# EAGLE board SparkX_smol_Environmental-Panel (EAGLE 9.6.2), part 1 of 9
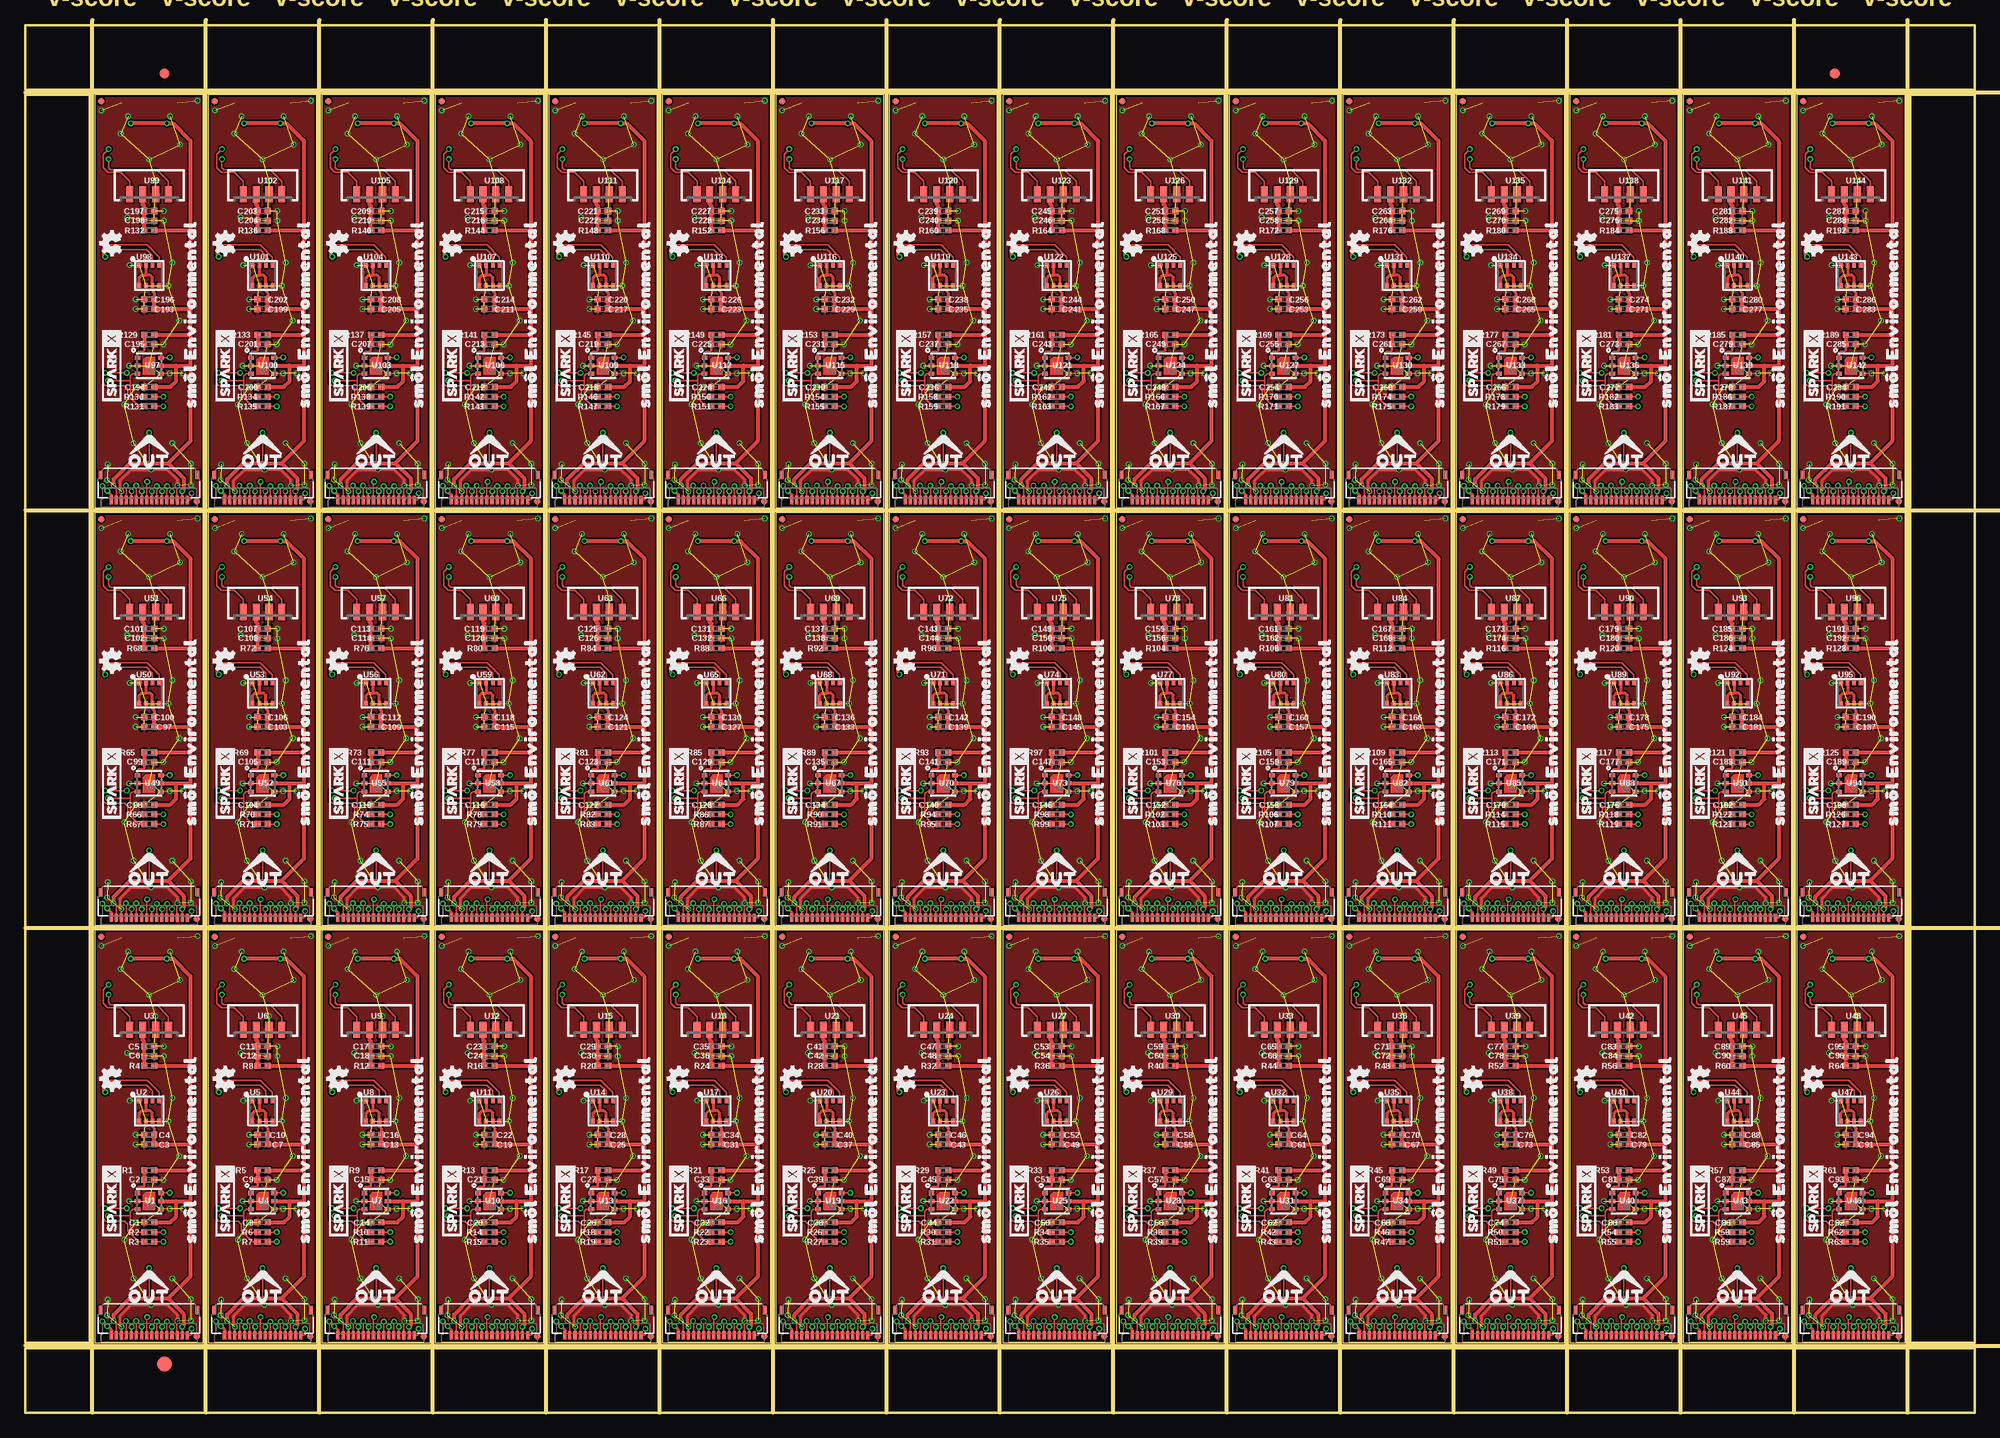
[diagram p0: board, top side]
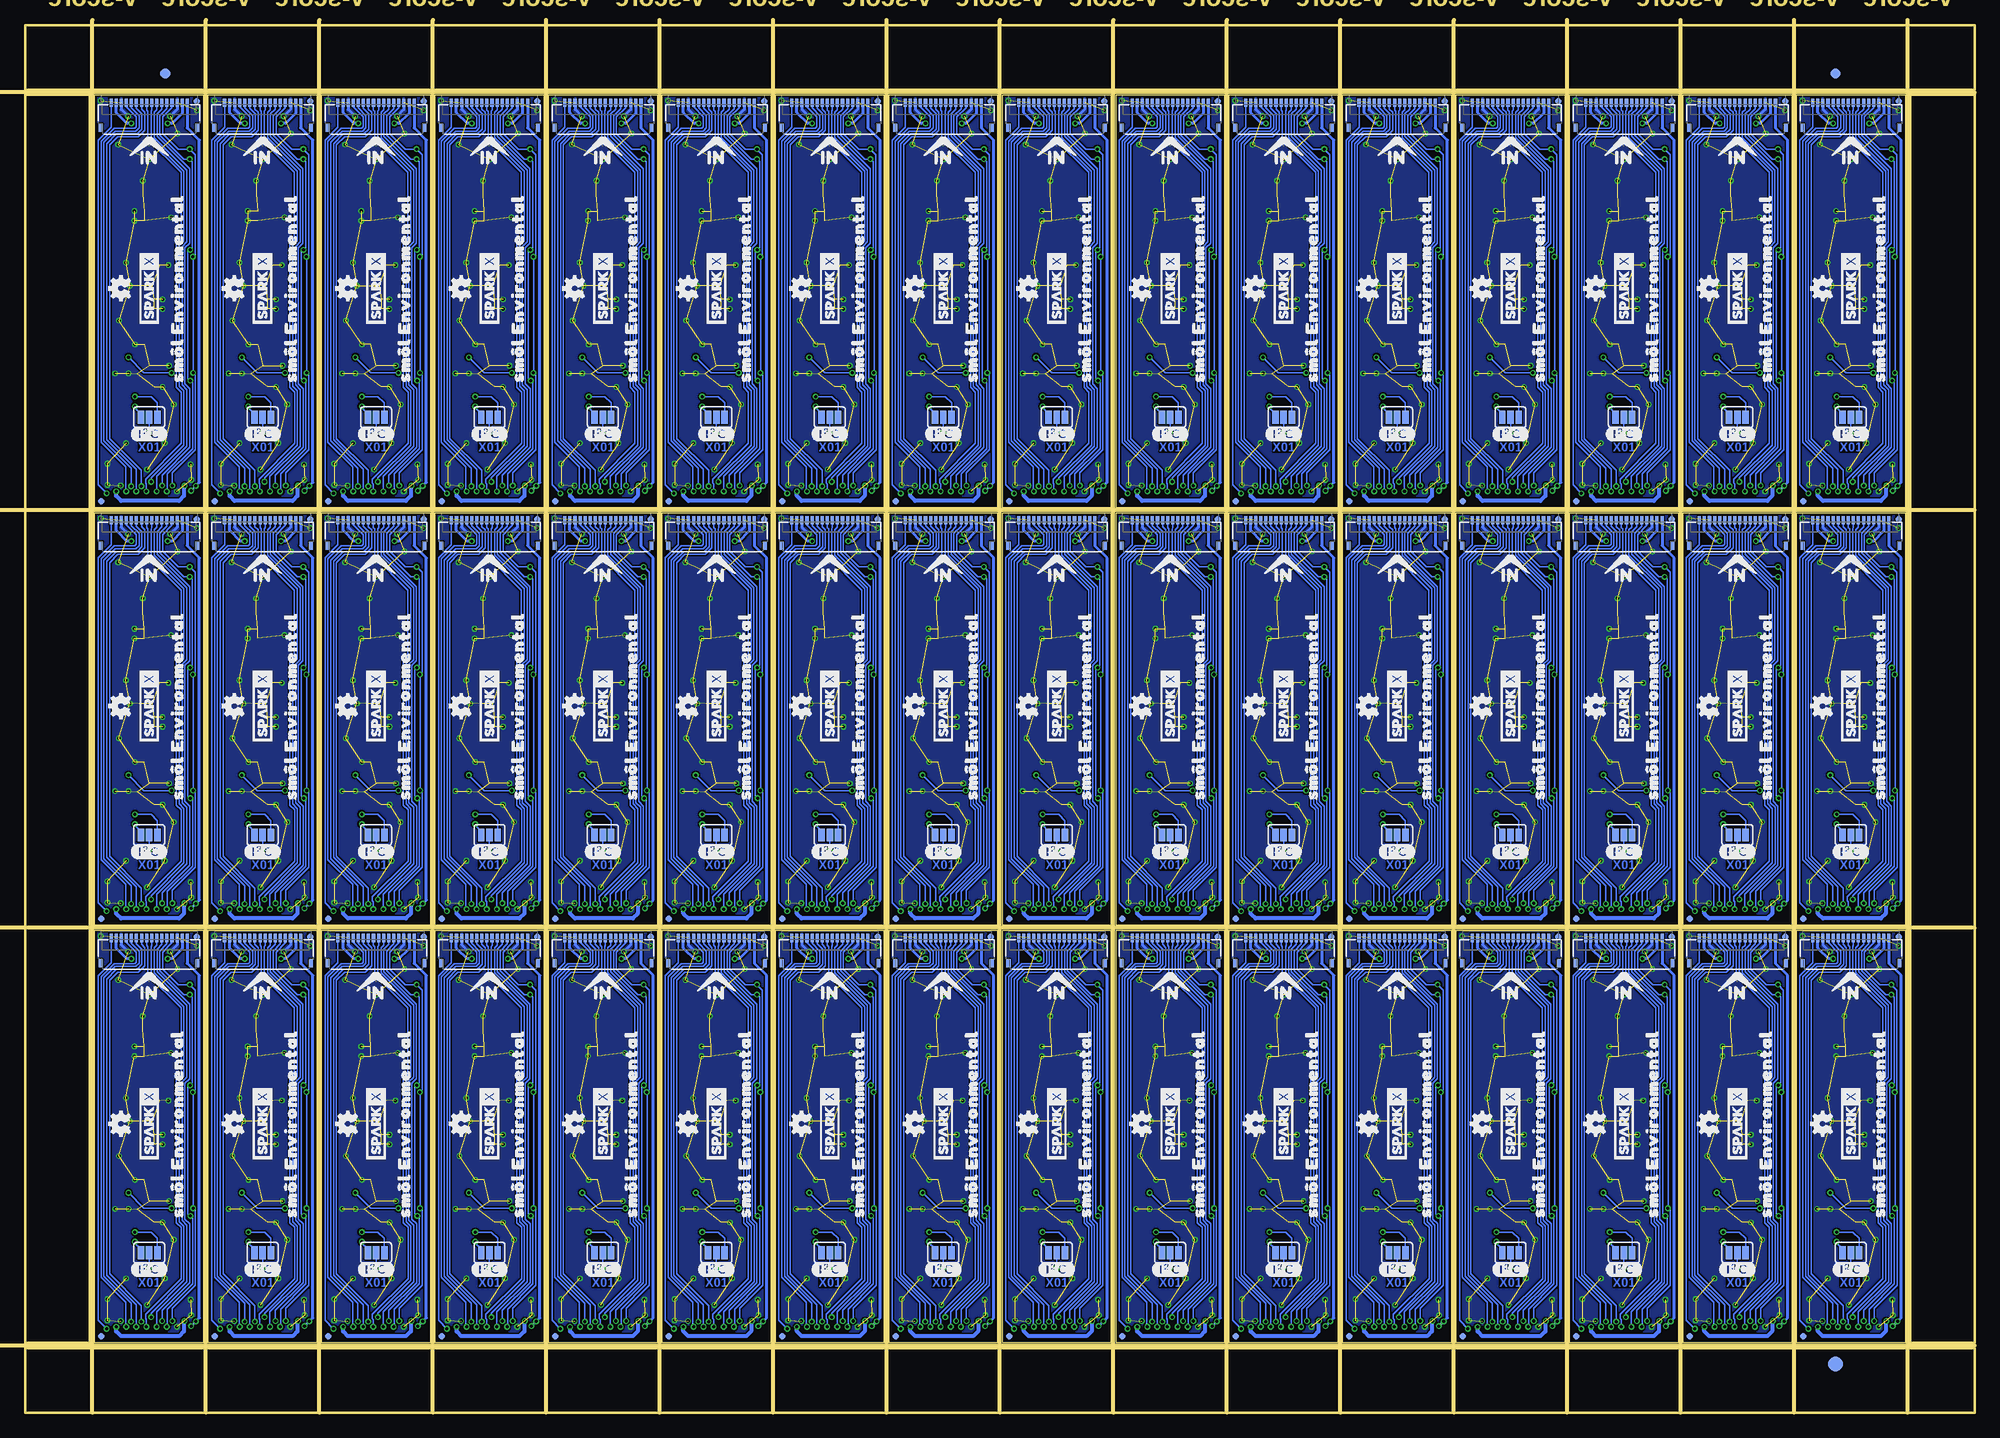
[diagram p1: board, bottom side, seen from below]

Size 192.02 x 136.65 mm. Coordinates in mm from the lower left corner, seen from the top.
Outline: 208 segments
Copper layers (1*16): Top 0.035mm / dielectric 1.5mm / Bottom 0.035mm
Design rules "SparkX_smol_Environmental": minimum track width 5mil, minimum drill 0.3mm, track to track 5mil, track to pad 5mil, pad to pad 5mil, via to via 5mil, smd to smd 5mil, copper to edge 7mil, drill to drill 7mil, minimum pad ring 5mil, minimum via ring 5mil, stop-mask expansion 2.5mil, vias tented up to drill 25mil, thermal gap 10mil
Milling: 21 lines

## Footprints (pad centres in the part's own frame; a part is rotated, then mirrored left to right if it is on the bottom)
0402-TIGHT = smd 0.6 x 0.6: 1 -0.5,0; 2 0.5,0
FIDUCIAL-1X2 = smd 1 x 1: 1 0,0
FIDUCIAL-1.5X3 = smd 1.5 x 1.5: 1 0,0
FIDUCIAL-MICRO = smd 0.635 x 0.635: 1 0,0
FPC_16_0.5MM = smd 0.3 x 0.8: 1 -3.75,1.35; 2 -3.25,1.35; 3 -2.75,1.35; 4 -2.25,1.35; 5 -1.75,1.35; 6 -1.25,1.35; 7 -0.75,1.35; 8 -0.25,1.35; 9 0.25,1.35; 10 0.75,1.35; 11 1.25,1.35; 12 1.75,1.35; 13 2.25,1.35; 14 2.75,1.35; 15 3.25,1.35; 16 3.75,1.35 | smd 0.4 x 0.8: MP1 -4.75,-1.15; MP2 4.75,-1.15
SMT-JUMPER_3_NO_SILK = smd 0.635 x 1.27: 1 -0.813,0; 2 0,0; 3 0.813,0
SGP40 = smd 0.55 x 0.4: 1 -1.15,0.8; 2 -1.15,0; 3 -1.15,-0.8; 4 1.15,-0.8; 5 1.15,0; 6 1.15,0.8 | smd 0.305 x 0.61: DIEPAD 0,0
LGA-8-2.5X2.5 = smd 0.35 x 0.5: 1 -0.975,1.025; 2 -0.325,1.025; 3 0.325,1.025; 4 0.975,1.025; 5 0.975,-1.025; 6 0.325,-1.025; 7 -0.325,-1.025; 8 -0.975,-1.025
VEML7700_TT = smd 0.7 x 1.6: 1 -1.905,-0.9; 2 -0.635,-0.9; 3 0.635,-0.9; 4 1.905,-0.9

## Placement (x,y rotation side)
C1  1.0uF  [0402-TIGHT]  12.19,18.73 180 top
C2  1.0uF  [0402-TIGHT]  12.19,22.92 0 top
C3  2.2uF  [0402-TIGHT]  12.19,26.42 180 top
C4  0.1uF  [0402-TIGHT]  12.19,27.37 180 top
C5  2.2uF  [0402-TIGHT]  12.19,36.07 0 top
C6  0.1uF  [0402-TIGHT]  12.19,35.12 0 top
C7  2.2uF  [0402-TIGHT]  23.37,26.42 180 top
C8  1.0uF  [0402-TIGHT]  23.37,18.73 180 top
C9  1.0uF  [0402-TIGHT]  23.37,22.92 0 top
C10  0.1uF  [0402-TIGHT]  23.37,27.37 180 top
C11  2.2uF  [0402-TIGHT]  23.37,36.07 0 top
C12  0.1uF  [0402-TIGHT]  23.37,35.12 0 top
C13  2.2uF  [0402-TIGHT]  34.54,26.42 180 top
C14  1.0uF  [0402-TIGHT]  34.54,18.73 180 top
C15  1.0uF  [0402-TIGHT]  34.54,22.92 0 top
C16  0.1uF  [0402-TIGHT]  34.54,27.37 180 top
C17  2.2uF  [0402-TIGHT]  34.54,36.07 0 top
C18  0.1uF  [0402-TIGHT]  34.54,35.12 0 top
C19  2.2uF  [0402-TIGHT]  45.72,26.42 180 top
C20  1.0uF  [0402-TIGHT]  45.72,18.73 180 top
C21  1.0uF  [0402-TIGHT]  45.72,22.92 0 top
C22  0.1uF  [0402-TIGHT]  45.72,27.37 180 top
C23  2.2uF  [0402-TIGHT]  45.72,36.07 0 top
C24  0.1uF  [0402-TIGHT]  45.72,35.12 0 top
C25  2.2uF  [0402-TIGHT]  56.9,26.42 180 top
C26  1.0uF  [0402-TIGHT]  56.9,18.73 180 top
C27  1.0uF  [0402-TIGHT]  56.9,22.92 0 top
C28  0.1uF  [0402-TIGHT]  56.9,27.37 180 top
C29  2.2uF  [0402-TIGHT]  56.9,36.07 0 top
C30  0.1uF  [0402-TIGHT]  56.9,35.12 0 top
C31  2.2uF  [0402-TIGHT]  68.07,26.42 180 top
C32  1.0uF  [0402-TIGHT]  68.07,18.73 180 top
C33  1.0uF  [0402-TIGHT]  68.07,22.92 0 top
C34  0.1uF  [0402-TIGHT]  68.07,27.37 180 top
C35  2.2uF  [0402-TIGHT]  68.07,36.07 0 top
C36  0.1uF  [0402-TIGHT]  68.07,35.12 0 top
C37  2.2uF  [0402-TIGHT]  79.25,26.42 180 top
C38  1.0uF  [0402-TIGHT]  79.25,18.73 180 top
C39  1.0uF  [0402-TIGHT]  79.25,22.92 0 top
C40  0.1uF  [0402-TIGHT]  79.25,27.37 180 top
C41  2.2uF  [0402-TIGHT]  79.25,36.07 0 top
C42  0.1uF  [0402-TIGHT]  79.25,35.12 0 top
C43  2.2uF  [0402-TIGHT]  90.42,26.42 180 top
C44  1.0uF  [0402-TIGHT]  90.42,18.73 180 top
C45  1.0uF  [0402-TIGHT]  90.42,22.92 0 top
C46  0.1uF  [0402-TIGHT]  90.42,27.37 180 top
C47  2.2uF  [0402-TIGHT]  90.42,36.07 0 top
C48  0.1uF  [0402-TIGHT]  90.42,35.12 0 top
C49  2.2uF  [0402-TIGHT]  101.6,26.42 180 top
C50  1.0uF  [0402-TIGHT]  101.6,18.73 180 top
C51  1.0uF  [0402-TIGHT]  101.6,22.92 0 top
C52  0.1uF  [0402-TIGHT]  101.6,27.37 180 top
C53  2.2uF  [0402-TIGHT]  101.6,36.07 0 top
C54  0.1uF  [0402-TIGHT]  101.6,35.12 0 top
C55  2.2uF  [0402-TIGHT]  112.78,26.42 180 top
C56  1.0uF  [0402-TIGHT]  112.78,18.73 180 top
C57  1.0uF  [0402-TIGHT]  112.78,22.92 0 top
C58  0.1uF  [0402-TIGHT]  112.78,27.37 180 top
C59  2.2uF  [0402-TIGHT]  112.78,36.07 0 top
C60  0.1uF  [0402-TIGHT]  112.78,35.12 0 top
C61  2.2uF  [0402-TIGHT]  123.95,26.42 180 top
C62  1.0uF  [0402-TIGHT]  123.95,18.73 180 top
C63  1.0uF  [0402-TIGHT]  123.95,22.92 0 top
C64  0.1uF  [0402-TIGHT]  123.95,27.37 180 top
C65  2.2uF  [0402-TIGHT]  123.95,36.07 0 top
C66  0.1uF  [0402-TIGHT]  123.95,35.12 0 top
C67  2.2uF  [0402-TIGHT]  135.13,26.42 180 top
C68  1.0uF  [0402-TIGHT]  135.13,18.73 180 top
C69  1.0uF  [0402-TIGHT]  135.13,22.92 0 top
C70  0.1uF  [0402-TIGHT]  135.13,27.37 180 top
C71  2.2uF  [0402-TIGHT]  135.13,36.07 0 top
C72  0.1uF  [0402-TIGHT]  135.13,35.12 0 top
C73  2.2uF  [0402-TIGHT]  146.3,26.42 180 top
C74  1.0uF  [0402-TIGHT]  146.3,18.73 180 top
C75  1.0uF  [0402-TIGHT]  146.3,22.92 0 top
C76  0.1uF  [0402-TIGHT]  146.3,27.37 180 top
C77  2.2uF  [0402-TIGHT]  146.3,36.07 0 top
C78  0.1uF  [0402-TIGHT]  146.3,35.12 0 top
C79  2.2uF  [0402-TIGHT]  157.48,26.42 180 top
C80  1.0uF  [0402-TIGHT]  157.48,18.73 180 top
C81  1.0uF  [0402-TIGHT]  157.48,22.92 0 top
C82  0.1uF  [0402-TIGHT]  157.48,27.37 180 top
C83  2.2uF  [0402-TIGHT]  157.48,36.07 0 top
C84  0.1uF  [0402-TIGHT]  157.48,35.12 0 top
C85  2.2uF  [0402-TIGHT]  168.66,26.42 180 top
C86  1.0uF  [0402-TIGHT]  168.66,18.73 180 top
C87  1.0uF  [0402-TIGHT]  168.66,22.92 0 top
C88  0.1uF  [0402-TIGHT]  168.66,27.37 180 top
C89  2.2uF  [0402-TIGHT]  168.66,36.07 0 top
C90  0.1uF  [0402-TIGHT]  168.66,35.12 0 top
C91  2.2uF  [0402-TIGHT]  179.83,26.42 180 top
C92  1.0uF  [0402-TIGHT]  179.83,18.73 180 top
C93  1.0uF  [0402-TIGHT]  179.83,22.92 0 top
C94  0.1uF  [0402-TIGHT]  179.83,27.37 180 top
C95  2.2uF  [0402-TIGHT]  179.83,36.07 0 top
C96  0.1uF  [0402-TIGHT]  179.83,35.12 0 top
C97  2.2uF  [0402-TIGHT]  12.19,67.56 180 top
C98  1.0uF  [0402-TIGHT]  12.19,59.88 180 top
C99  1.0uF  [0402-TIGHT]  12.19,64.07 0 top
C100  0.1uF  [0402-TIGHT]  12.19,68.52 180 top
C101  2.2uF  [0402-TIGHT]  12.19,77.22 0 top
C102  0.1uF  [0402-TIGHT]  12.19,76.26 0 top
C103  2.2uF  [0402-TIGHT]  23.37,67.56 180 top
C104  1.0uF  [0402-TIGHT]  23.37,59.88 180 top
C105  1.0uF  [0402-TIGHT]  23.37,64.07 0 top
C106  0.1uF  [0402-TIGHT]  23.37,68.52 180 top
C107  2.2uF  [0402-TIGHT]  23.37,77.22 0 top
C108  0.1uF  [0402-TIGHT]  23.37,76.26 0 top
C109  2.2uF  [0402-TIGHT]  34.54,67.56 180 top
C110  1.0uF  [0402-TIGHT]  34.54,59.88 180 top
C111  1.0uF  [0402-TIGHT]  34.54,64.07 0 top
C112  0.1uF  [0402-TIGHT]  34.54,68.52 180 top
C113  2.2uF  [0402-TIGHT]  34.54,77.22 0 top
C114  0.1uF  [0402-TIGHT]  34.54,76.26 0 top
C115  2.2uF  [0402-TIGHT]  45.72,67.56 180 top
C116  1.0uF  [0402-TIGHT]  45.72,59.88 180 top
C117  1.0uF  [0402-TIGHT]  45.72,64.07 0 top
C118  0.1uF  [0402-TIGHT]  45.72,68.52 180 top
C119  2.2uF  [0402-TIGHT]  45.72,77.22 0 top
C120  0.1uF  [0402-TIGHT]  45.72,76.26 0 top
C121  2.2uF  [0402-TIGHT]  56.9,67.56 180 top
C122  1.0uF  [0402-TIGHT]  56.9,59.88 180 top
C123  1.0uF  [0402-TIGHT]  56.9,64.07 0 top
C124  0.1uF  [0402-TIGHT]  56.9,68.52 180 top
C125  2.2uF  [0402-TIGHT]  56.9,77.22 0 top
C126  0.1uF  [0402-TIGHT]  56.9,76.26 0 top
C127  2.2uF  [0402-TIGHT]  68.07,67.56 180 top
C128  1.0uF  [0402-TIGHT]  68.07,59.88 180 top
C129  1.0uF  [0402-TIGHT]  68.07,64.07 0 top
C130  0.1uF  [0402-TIGHT]  68.07,68.52 180 top
C131  2.2uF  [0402-TIGHT]  68.07,77.22 0 top
C132  0.1uF  [0402-TIGHT]  68.07,76.26 0 top
C133  2.2uF  [0402-TIGHT]  79.25,67.56 180 top
C134  1.0uF  [0402-TIGHT]  79.25,59.88 180 top
C135  1.0uF  [0402-TIGHT]  79.25,64.07 0 top
C136  0.1uF  [0402-TIGHT]  79.25,68.52 180 top
C137  2.2uF  [0402-TIGHT]  79.25,77.22 0 top
C138  0.1uF  [0402-TIGHT]  79.25,76.26 0 top
C139  2.2uF  [0402-TIGHT]  90.42,67.56 180 top
C140  1.0uF  [0402-TIGHT]  90.42,59.88 180 top
C141  1.0uF  [0402-TIGHT]  90.42,64.07 0 top
C142  0.1uF  [0402-TIGHT]  90.42,68.52 180 top
C143  2.2uF  [0402-TIGHT]  90.42,77.22 0 top
C144  0.1uF  [0402-TIGHT]  90.42,76.26 0 top
C145  2.2uF  [0402-TIGHT]  101.6,67.56 180 top
C146  1.0uF  [0402-TIGHT]  101.6,59.88 180 top
C147  1.0uF  [0402-TIGHT]  101.6,64.07 0 top
C148  0.1uF  [0402-TIGHT]  101.6,68.52 180 top
C149  2.2uF  [0402-TIGHT]  101.6,77.22 0 top
C150  0.1uF  [0402-TIGHT]  101.6,76.26 0 top
C151  2.2uF  [0402-TIGHT]  112.78,67.56 180 top
C152  1.0uF  [0402-TIGHT]  112.78,59.88 180 top
C153  1.0uF  [0402-TIGHT]  112.78,64.07 0 top
C154  0.1uF  [0402-TIGHT]  112.78,68.52 180 top
C155  2.2uF  [0402-TIGHT]  112.78,77.22 0 top
C156  0.1uF  [0402-TIGHT]  112.78,76.26 0 top
C157  2.2uF  [0402-TIGHT]  123.95,67.56 180 top
C158  1.0uF  [0402-TIGHT]  123.95,59.88 180 top
C159  1.0uF  [0402-TIGHT]  123.95,64.07 0 top
C160  0.1uF  [0402-TIGHT]  123.95,68.52 180 top
C161  2.2uF  [0402-TIGHT]  123.95,77.22 0 top
C162  0.1uF  [0402-TIGHT]  123.95,76.26 0 top
C163  2.2uF  [0402-TIGHT]  135.13,67.56 180 top
C164  1.0uF  [0402-TIGHT]  135.13,59.88 180 top
C165  1.0uF  [0402-TIGHT]  135.13,64.07 0 top
C166  0.1uF  [0402-TIGHT]  135.13,68.52 180 top
C167  2.2uF  [0402-TIGHT]  135.13,77.22 0 top
C168  0.1uF  [0402-TIGHT]  135.13,76.26 0 top
C169  2.2uF  [0402-TIGHT]  146.3,67.56 180 top
C170  1.0uF  [0402-TIGHT]  146.3,59.88 180 top
C171  1.0uF  [0402-TIGHT]  146.3,64.07 0 top
C172  0.1uF  [0402-TIGHT]  146.3,68.52 180 top
C173  2.2uF  [0402-TIGHT]  146.3,77.22 0 top
C174  0.1uF  [0402-TIGHT]  146.3,76.26 0 top
C175  2.2uF  [0402-TIGHT]  157.48,67.56 180 top
C176  1.0uF  [0402-TIGHT]  157.48,59.88 180 top
C177  1.0uF  [0402-TIGHT]  157.48,64.07 0 top
C178  0.1uF  [0402-TIGHT]  157.48,68.52 180 top
C179  2.2uF  [0402-TIGHT]  157.48,77.22 0 top
C180  0.1uF  [0402-TIGHT]  157.48,76.26 0 top
C181  2.2uF  [0402-TIGHT]  168.66,67.56 180 top
C182  1.0uF  [0402-TIGHT]  168.66,59.88 180 top
C183  1.0uF  [0402-TIGHT]  168.66,64.07 0 top
C184  0.1uF  [0402-TIGHT]  168.66,68.52 180 top
C185  2.2uF  [0402-TIGHT]  168.66,77.22 0 top
C186  0.1uF  [0402-TIGHT]  168.66,76.26 0 top
C187  2.2uF  [0402-TIGHT]  179.83,67.56 180 top
C188  1.0uF  [0402-TIGHT]  179.83,59.88 180 top
C189  1.0uF  [0402-TIGHT]  179.83,64.07 0 top
C190  0.1uF  [0402-TIGHT]  179.83,68.52 180 top
C191  2.2uF  [0402-TIGHT]  179.83,77.22 0 top
C192  0.1uF  [0402-TIGHT]  179.83,76.26 0 top
C193  2.2uF  [0402-TIGHT]  12.19,108.71 180 top
C194  1.0uF  [0402-TIGHT]  12.19,101.03 180 top
C195  1.0uF  [0402-TIGHT]  12.19,105.22 0 top
C196  0.1uF  [0402-TIGHT]  12.19,109.66 180 top
C197  2.2uF  [0402-TIGHT]  12.19,118.36 0 top
C198  0.1uF  [0402-TIGHT]  12.19,117.41 0 top
C199  2.2uF  [0402-TIGHT]  23.37,108.71 180 top
C200  1.0uF  [0402-TIGHT]  23.37,101.03 180 top
C201  1.0uF  [0402-TIGHT]  23.37,105.22 0 top
C202  0.1uF  [0402-TIGHT]  23.37,109.66 180 top
C203  2.2uF  [0402-TIGHT]  23.37,118.36 0 top
C204  0.1uF  [0402-TIGHT]  23.37,117.41 0 top
C205  2.2uF  [0402-TIGHT]  34.54,108.71 180 top
C206  1.0uF  [0402-TIGHT]  34.54,101.03 180 top
C207  1.0uF  [0402-TIGHT]  34.54,105.22 0 top
C208  0.1uF  [0402-TIGHT]  34.54,109.66 180 top
C209  2.2uF  [0402-TIGHT]  34.54,118.36 0 top
C210  0.1uF  [0402-TIGHT]  34.54,117.41 0 top
C211  2.2uF  [0402-TIGHT]  45.72,108.71 180 top
C212  1.0uF  [0402-TIGHT]  45.72,101.03 180 top
C213  1.0uF  [0402-TIGHT]  45.72,105.22 0 top
C214  0.1uF  [0402-TIGHT]  45.72,109.66 180 top
C215  2.2uF  [0402-TIGHT]  45.72,118.36 0 top
C216  0.1uF  [0402-TIGHT]  45.72,117.41 0 top
C217  2.2uF  [0402-TIGHT]  56.9,108.71 180 top
C218  1.0uF  [0402-TIGHT]  56.9,101.03 180 top
C219  1.0uF  [0402-TIGHT]  56.9,105.22 0 top
C220  0.1uF  [0402-TIGHT]  56.9,109.66 180 top
C221  2.2uF  [0402-TIGHT]  56.9,118.36 0 top
C222  0.1uF  [0402-TIGHT]  56.9,117.41 0 top
C223  2.2uF  [0402-TIGHT]  68.07,108.71 180 top
C224  1.0uF  [0402-TIGHT]  68.07,101.03 180 top
C225  1.0uF  [0402-TIGHT]  68.07,105.22 0 top
C226  0.1uF  [0402-TIGHT]  68.07,109.66 180 top
C227  2.2uF  [0402-TIGHT]  68.07,118.36 0 top
C228  0.1uF  [0402-TIGHT]  68.07,117.41 0 top
C229  2.2uF  [0402-TIGHT]  79.25,108.71 180 top
C230  1.0uF  [0402-TIGHT]  79.25,101.03 180 top
C231  1.0uF  [0402-TIGHT]  79.25,105.22 0 top
C232  0.1uF  [0402-TIGHT]  79.25,109.66 180 top
C233  2.2uF  [0402-TIGHT]  79.25,118.36 0 top
C234  0.1uF  [0402-TIGHT]  79.25,117.41 0 top
C235  2.2uF  [0402-TIGHT]  90.42,108.71 180 top
C236  1.0uF  [0402-TIGHT]  90.42,101.03 180 top
C237  1.0uF  [0402-TIGHT]  90.42,105.22 0 top
C238  0.1uF  [0402-TIGHT]  90.42,109.66 180 top
C239  2.2uF  [0402-TIGHT]  90.42,118.36 0 top
C240  0.1uF  [0402-TIGHT]  90.42,117.41 0 top
C241  2.2uF  [0402-TIGHT]  101.6,108.71 180 top
C242  1.0uF  [0402-TIGHT]  101.6,101.03 180 top
C243  1.0uF  [0402-TIGHT]  101.6,105.22 0 top
C244  0.1uF  [0402-TIGHT]  101.6,109.66 180 top
C245  2.2uF  [0402-TIGHT]  101.6,118.36 0 top
C246  0.1uF  [0402-TIGHT]  101.6,117.41 0 top
C247  2.2uF  [0402-TIGHT]  112.78,108.71 180 top
C248  1.0uF  [0402-TIGHT]  112.78,101.03 180 top
C249  1.0uF  [0402-TIGHT]  112.78,105.22 0 top
C250  0.1uF  [0402-TIGHT]  112.78,109.66 180 top
C251  2.2uF  [0402-TIGHT]  112.78,118.36 0 top
C252  0.1uF  [0402-TIGHT]  112.78,117.41 0 top
C253  2.2uF  [0402-TIGHT]  123.95,108.71 180 top
C254  1.0uF  [0402-TIGHT]  123.95,101.03 180 top
C255  1.0uF  [0402-TIGHT]  123.95,105.22 0 top
C256  0.1uF  [0402-TIGHT]  123.95,109.66 180 top
C257  2.2uF  [0402-TIGHT]  123.95,118.36 0 top
C258  0.1uF  [0402-TIGHT]  123.95,117.41 0 top
C259  2.2uF  [0402-TIGHT]  135.13,108.71 180 top
C260  1.0uF  [0402-TIGHT]  135.13,101.03 180 top
C261  1.0uF  [0402-TIGHT]  135.13,105.22 0 top
C262  0.1uF  [0402-TIGHT]  135.13,109.66 180 top
C263  2.2uF  [0402-TIGHT]  135.13,118.36 0 top
C264  0.1uF  [0402-TIGHT]  135.13,117.41 0 top
C265  2.2uF  [0402-TIGHT]  146.3,108.71 180 top
C266  1.0uF  [0402-TIGHT]  146.3,101.03 180 top
C267  1.0uF  [0402-TIGHT]  146.3,105.22 0 top
C268  0.1uF  [0402-TIGHT]  146.3,109.66 180 top
C269  2.2uF  [0402-TIGHT]  146.3,118.36 0 top
C270  0.1uF  [0402-TIGHT]  146.3,117.41 0 top
C271  2.2uF  [0402-TIGHT]  157.48,108.71 180 top
C272  1.0uF  [0402-TIGHT]  157.48,101.03 180 top
C273  1.0uF  [0402-TIGHT]  157.48,105.22 0 top
C274  0.1uF  [0402-TIGHT]  157.48,109.66 180 top
C275  2.2uF  [0402-TIGHT]  157.48,118.36 0 top
C276  0.1uF  [0402-TIGHT]  157.48,117.41 0 top
C277  2.2uF  [0402-TIGHT]  168.66,108.71 180 top
C278  1.0uF  [0402-TIGHT]  168.66,101.03 180 top
C279  1.0uF  [0402-TIGHT]  168.66,105.22 0 top
C280  0.1uF  [0402-TIGHT]  168.66,109.66 180 top
C281  2.2uF  [0402-TIGHT]  168.66,118.36 0 top
C282  0.1uF  [0402-TIGHT]  168.66,117.41 0 top
C283  2.2uF  [0402-TIGHT]  179.83,108.71 180 top
C284  1.0uF  [0402-TIGHT]  179.83,101.03 180 top
C285  1.0uF  [0402-TIGHT]  179.83,105.22 0 top
C286  0.1uF  [0402-TIGHT]  179.83,109.66 180 top
C287  2.2uF  [0402-TIGHT]  179.83,118.36 0 top
C288  0.1uF  [0402-TIGHT]  179.83,117.41 0 top
E$1  [FIDUCIAL-1X2]  13.72,131.89 0 top
E$2  [FIDUCIAL-1X2]  13.72,131.89 0 bottom
E$3  [FIDUCIAL-1X2]  178.24,131.89 0 top
E$4  [FIDUCIAL-1X2]  178.24,131.89 0 bottom
E$5  [FIDUCIAL-1.5X3]  13.72,4.76 0 top
E$6  [FIDUCIAL-1.5X3]  13.72,4.76 0 bottom
FD1  FIDUCIALUFIDUCIAL  [FIDUCIAL-MICRO]  7.49,46.86 0 top
FD2  FIDUCIALUFIDUCIAL  [FIDUCIAL-MICRO]  7.49,46.86 0 bottom
FD3  FIDUCIALUFIDUCIAL  [FIDUCIAL-MICRO]  16.89,7.49 0 top
FD4  FIDUCIALUFIDUCIAL  [FIDUCIAL-MICRO]  16.89,7.49 0 bottom
FD5  FIDUCIALUFIDUCIAL  [FIDUCIAL-MICRO]  18.67,46.86 0 top
FD6  FIDUCIALUFIDUCIAL  [FIDUCIAL-MICRO]  18.67,46.86 0 bottom
FD7  FIDUCIALUFIDUCIAL  [FIDUCIAL-MICRO]  28.07,7.49 0 top
FD8  FIDUCIALUFIDUCIAL  [FIDUCIAL-MICRO]  28.07,7.49 0 bottom
FD9  FIDUCIALUFIDUCIAL  [FIDUCIAL-MICRO]  29.84,46.86 0 top
FD10  FIDUCIALUFIDUCIAL  [FIDUCIAL-MICRO]  29.84,46.86 0 bottom
FD11  FIDUCIALUFIDUCIAL  [FIDUCIAL-MICRO]  39.24,7.49 0 top
FD12  FIDUCIALUFIDUCIAL  [FIDUCIAL-MICRO]  39.24,7.49 0 bottom
FD13  FIDUCIALUFIDUCIAL  [FIDUCIAL-MICRO]  41.02,46.86 0 top
FD14  FIDUCIALUFIDUCIAL  [FIDUCIAL-MICRO]  41.02,46.86 0 bottom
FD15  FIDUCIALUFIDUCIAL  [FIDUCIAL-MICRO]  50.42,7.49 0 top
FD16  FIDUCIALUFIDUCIAL  [FIDUCIAL-MICRO]  50.42,7.49 0 bottom
FD17  FIDUCIALUFIDUCIAL  [FIDUCIAL-MICRO]  52.2,46.86 0 top
FD18  FIDUCIALUFIDUCIAL  [FIDUCIAL-MICRO]  52.2,46.86 0 bottom
FD19  FIDUCIALUFIDUCIAL  [FIDUCIAL-MICRO]  61.59,7.49 0 top
FD20  FIDUCIALUFIDUCIAL  [FIDUCIAL-MICRO]  61.59,7.49 0 bottom
FD21  FIDUCIALUFIDUCIAL  [FIDUCIAL-MICRO]  63.37,46.86 0 top
FD22  FIDUCIALUFIDUCIAL  [FIDUCIAL-MICRO]  63.37,46.86 0 bottom
FD23  FIDUCIALUFIDUCIAL  [FIDUCIAL-MICRO]  72.77,7.49 0 top
FD24  FIDUCIALUFIDUCIAL  [FIDUCIAL-MICRO]  72.77,7.49 0 bottom
FD25  FIDUCIALUFIDUCIAL  [FIDUCIAL-MICRO]  74.55,46.86 0 top
FD26  FIDUCIALUFIDUCIAL  [FIDUCIAL-MICRO]  74.55,46.86 0 bottom
FD27  FIDUCIALUFIDUCIAL  [FIDUCIAL-MICRO]  83.95,7.49 0 top
FD28  FIDUCIALUFIDUCIAL  [FIDUCIAL-MICRO]  83.95,7.49 0 bottom
FD29  FIDUCIALUFIDUCIAL  [FIDUCIAL-MICRO]  85.73,46.86 0 top
FD30  FIDUCIALUFIDUCIAL  [FIDUCIAL-MICRO]  85.73,46.86 0 bottom
FD31  FIDUCIALUFIDUCIAL  [FIDUCIAL-MICRO]  95.12,7.49 0 top
FD32  FIDUCIALUFIDUCIAL  [FIDUCIAL-MICRO]  95.12,7.49 0 bottom
FD33  FIDUCIALUFIDUCIAL  [FIDUCIAL-MICRO]  96.9,46.86 0 top
FD34  FIDUCIALUFIDUCIAL  [FIDUCIAL-MICRO]  96.9,46.86 0 bottom
FD35  FIDUCIALUFIDUCIAL  [FIDUCIAL-MICRO]  106.3,7.49 0 top
FD36  FIDUCIALUFIDUCIAL  [FIDUCIAL-MICRO]  106.3,7.49 0 bottom
FD37  FIDUCIALUFIDUCIAL  [FIDUCIAL-MICRO]  108.08,46.86 0 top
FD38  FIDUCIALUFIDUCIAL  [FIDUCIAL-MICRO]  108.08,46.86 0 bottom
FD39  FIDUCIALUFIDUCIAL  [FIDUCIAL-MICRO]  117.48,7.49 0 top
FD40  FIDUCIALUFIDUCIAL  [FIDUCIAL-MICRO]  117.48,7.49 0 bottom
FD41  FIDUCIALUFIDUCIAL  [FIDUCIAL-MICRO]  119.25,46.86 0 top
FD42  FIDUCIALUFIDUCIAL  [FIDUCIAL-MICRO]  119.25,46.86 0 bottom
FD43  FIDUCIALUFIDUCIAL  [FIDUCIAL-MICRO]  128.65,7.49 0 top
FD44  FIDUCIALUFIDUCIAL  [FIDUCIAL-MICRO]  128.65,7.49 0 bottom
FD45  FIDUCIALUFIDUCIAL  [FIDUCIAL-MICRO]  130.43,46.86 0 top
FD46  FIDUCIALUFIDUCIAL  [FIDUCIAL-MICRO]  130.43,46.86 0 bottom
FD47  FIDUCIALUFIDUCIAL  [FIDUCIAL-MICRO]  139.83,7.49 0 top
FD48  FIDUCIALUFIDUCIAL  [FIDUCIAL-MICRO]  139.83,7.49 0 bottom
FD49  FIDUCIALUFIDUCIAL  [FIDUCIAL-MICRO]  141.61,46.86 0 top
FD50  FIDUCIALUFIDUCIAL  [FIDUCIAL-MICRO]  141.61,46.86 0 bottom
FD51  FIDUCIALUFIDUCIAL  [FIDUCIAL-MICRO]  151,7.49 0 top
FD52  FIDUCIALUFIDUCIAL  [FIDUCIAL-MICRO]  151,7.49 0 bottom
FD53  FIDUCIALUFIDUCIAL  [FIDUCIAL-MICRO]  152.78,46.86 0 top
FD54  FIDUCIALUFIDUCIAL  [FIDUCIAL-MICRO]  152.78,46.86 0 bottom
FD55  FIDUCIALUFIDUCIAL  [FIDUCIAL-MICRO]  162.18,7.49 0 top
FD56  FIDUCIALUFIDUCIAL  [FIDUCIAL-MICRO]  162.18,7.49 0 bottom
FD57  FIDUCIALUFIDUCIAL  [FIDUCIAL-MICRO]  163.96,46.86 0 top
FD58  FIDUCIALUFIDUCIAL  [FIDUCIAL-MICRO]  163.96,46.86 0 bottom
FD59  FIDUCIALUFIDUCIAL  [FIDUCIAL-MICRO]  173.36,7.49 0 top
FD60  FIDUCIALUFIDUCIAL  [FIDUCIAL-MICRO]  173.36,7.49 0 bottom
FD61  FIDUCIALUFIDUCIAL  [FIDUCIAL-MICRO]  175.13,46.86 0 top
FD62  FIDUCIALUFIDUCIAL  [FIDUCIAL-MICRO]  175.13,46.86 0 bottom
FD63  FIDUCIALUFIDUCIAL  [FIDUCIAL-MICRO]  184.53,7.49 0 top
FD64  FIDUCIALUFIDUCIAL  [FIDUCIAL-MICRO]  184.53,7.49 0 bottom
FD65  FIDUCIALUFIDUCIAL  [FIDUCIAL-MICRO]  7.49,88.01 0 top
FD66  FIDUCIALUFIDUCIAL  [FIDUCIAL-MICRO]  7.49,88.01 0 bottom
FD67  FIDUCIALUFIDUCIAL  [FIDUCIAL-MICRO]  16.89,48.64 0 top
FD68  FIDUCIALUFIDUCIAL  [FIDUCIAL-MICRO]  16.89,48.64 0 bottom
FD69  FIDUCIALUFIDUCIAL  [FIDUCIAL-MICRO]  18.67,88.01 0 top
FD70  FIDUCIALUFIDUCIAL  [FIDUCIAL-MICRO]  18.67,88.01 0 bottom
FD71  FIDUCIALUFIDUCIAL  [FIDUCIAL-MICRO]  28.07,48.64 0 top
FD72  FIDUCIALUFIDUCIAL  [FIDUCIAL-MICRO]  28.07,48.64 0 bottom
FD73  FIDUCIALUFIDUCIAL  [FIDUCIAL-MICRO]  29.84,88.01 0 top
FD74  FIDUCIALUFIDUCIAL  [FIDUCIAL-MICRO]  29.84,88.01 0 bottom
FD75  FIDUCIALUFIDUCIAL  [FIDUCIAL-MICRO]  39.24,48.64 0 top
FD76  FIDUCIALUFIDUCIAL  [FIDUCIAL-MICRO]  39.24,48.64 0 bottom
FD77  FIDUCIALUFIDUCIAL  [FIDUCIAL-MICRO]  41.02,88.01 0 top
FD78  FIDUCIALUFIDUCIAL  [FIDUCIAL-MICRO]  41.02,88.01 0 bottom
FD79  FIDUCIALUFIDUCIAL  [FIDUCIAL-MICRO]  50.42,48.64 0 top
FD80  FIDUCIALUFIDUCIAL  [FIDUCIAL-MICRO]  50.42,48.64 0 bottom
FD81  FIDUCIALUFIDUCIAL  [FIDUCIAL-MICRO]  52.2,88.01 0 top
FD82  FIDUCIALUFIDUCIAL  [FIDUCIAL-MICRO]  52.2,88.01 0 bottom
FD83  FIDUCIALUFIDUCIAL  [FIDUCIAL-MICRO]  61.59,48.64 0 top
FD84  FIDUCIALUFIDUCIAL  [FIDUCIAL-MICRO]  61.59,48.64 0 bottom
FD85  FIDUCIALUFIDUCIAL  [FIDUCIAL-MICRO]  63.37,88.01 0 top
FD86  FIDUCIALUFIDUCIAL  [FIDUCIAL-MICRO]  63.37,88.01 0 bottom
FD87  FIDUCIALUFIDUCIAL  [FIDUCIAL-MICRO]  72.77,48.64 0 top
FD88  FIDUCIALUFIDUCIAL  [FIDUCIAL-MICRO]  72.77,48.64 0 bottom
FD89  FIDUCIALUFIDUCIAL  [FIDUCIAL-MICRO]  74.55,88.01 0 top
FD90  FIDUCIALUFIDUCIAL  [FIDUCIAL-MICRO]  74.55,88.01 0 bottom
FD91  FIDUCIALUFIDUCIAL  [FIDUCIAL-MICRO]  83.95,48.64 0 top
FD92  FIDUCIALUFIDUCIAL  [FIDUCIAL-MICRO]  83.95,48.64 0 bottom
FD93  FIDUCIALUFIDUCIAL  [FIDUCIAL-MICRO]  85.73,88.01 0 top
FD94  FIDUCIALUFIDUCIAL  [FIDUCIAL-MICRO]  85.73,88.01 0 bottom
FD95  FIDUCIALUFIDUCIAL  [FIDUCIAL-MICRO]  95.12,48.64 0 top
FD96  FIDUCIALUFIDUCIAL  [FIDUCIAL-MICRO]  95.12,48.64 0 bottom
FD97  FIDUCIALUFIDUCIAL  [FIDUCIAL-MICRO]  96.9,88.01 0 top
FD98  FIDUCIALUFIDUCIAL  [FIDUCIAL-MICRO]  96.9,88.01 0 bottom
FD99  FIDUCIALUFIDUCIAL  [FIDUCIAL-MICRO]  106.3,48.64 0 top
FD100  FIDUCIALUFIDUCIAL  [FIDUCIAL-MICRO]  106.3,48.64 0 bottom
FD101  FIDUCIALUFIDUCIAL  [FIDUCIAL-MICRO]  108.08,88.01 0 top
FD102  FIDUCIALUFIDUCIAL  [FIDUCIAL-MICRO]  108.08,88.01 0 bottom
FD103  FIDUCIALUFIDUCIAL  [FIDUCIAL-MICRO]  117.48,48.64 0 top
FD104  FIDUCIALUFIDUCIAL  [FIDUCIAL-MICRO]  117.48,48.64 0 bottom
FD105  FIDUCIALUFIDUCIAL  [FIDUCIAL-MICRO]  119.25,88.01 0 top
FD106  FIDUCIALUFIDUCIAL  [FIDUCIAL-MICRO]  119.25,88.01 0 bottom
FD107  FIDUCIALUFIDUCIAL  [FIDUCIAL-MICRO]  128.65,48.64 0 top
FD108  FIDUCIALUFIDUCIAL  [FIDUCIAL-MICRO]  128.65,48.64 0 bottom
FD109  FIDUCIALUFIDUCIAL  [FIDUCIAL-MICRO]  130.43,88.01 0 top
FD110  FIDUCIALUFIDUCIAL  [FIDUCIAL-MICRO]  130.43,88.01 0 bottom
FD111  FIDUCIALUFIDUCIAL  [FIDUCIAL-MICRO]  139.83,48.64 0 top
FD112  FIDUCIALUFIDUCIAL  [FIDUCIAL-MICRO]  139.83,48.64 0 bottom
FD113  FIDUCIALUFIDUCIAL  [FIDUCIAL-MICRO]  141.61,88.01 0 top
FD114  FIDUCIALUFIDUCIAL  [FIDUCIAL-MICRO]  141.61,88.01 0 bottom
FD115  FIDUCIALUFIDUCIAL  [FIDUCIAL-MICRO]  151,48.64 0 top
FD116  FIDUCIALUFIDUCIAL  [FIDUCIAL-MICRO]  151,48.64 0 bottom
FD117  FIDUCIALUFIDUCIAL  [FIDUCIAL-MICRO]  152.78,88.01 0 top
FD118  FIDUCIALUFIDUCIAL  [FIDUCIAL-MICRO]  152.78,88.01 0 bottom
FD119  FIDUCIALUFIDUCIAL  [FIDUCIAL-MICRO]  162.18,48.64 0 top
FD120  FIDUCIALUFIDUCIAL  [FIDUCIAL-MICRO]  162.18,48.64 0 bottom
FD121  FIDUCIALUFIDUCIAL  [FIDUCIAL-MICRO]  163.96,88.01 0 top
FD122  FIDUCIALUFIDUCIAL  [FIDUCIAL-MICRO]  163.96,88.01 0 bottom
FD123  FIDUCIALUFIDUCIAL  [FIDUCIAL-MICRO]  173.36,48.64 0 top
FD124  FIDUCIALUFIDUCIAL  [FIDUCIAL-MICRO]  173.36,48.64 0 bottom
FD125  FIDUCIALUFIDUCIAL  [FIDUCIAL-MICRO]  175.13,88.01 0 top
FD126  FIDUCIALUFIDUCIAL  [FIDUCIAL-MICRO]  175.13,88.01 0 bottom
FD127  FIDUCIALUFIDUCIAL  [FIDUCIAL-MICRO]  184.53,48.64 0 top
FD128  FIDUCIALUFIDUCIAL  [FIDUCIAL-MICRO]  184.53,48.64 0 bottom
FD129  FIDUCIALUFIDUCIAL  [FIDUCIAL-MICRO]  7.49,129.16 0 top
FD130  FIDUCIALUFIDUCIAL  [FIDUCIAL-MICRO]  7.49,129.16 0 bottom
FD131  FIDUCIALUFIDUCIAL  [FIDUCIAL-MICRO]  16.89,89.79 0 top
FD132  FIDUCIALUFIDUCIAL  [FIDUCIAL-MICRO]  16.89,89.79 0 bottom
FD133  FIDUCIALUFIDUCIAL  [FIDUCIAL-MICRO]  18.67,129.16 0 top
FD134  FIDUCIALUFIDUCIAL  [FIDUCIAL-MICRO]  18.67,129.16 0 bottom
FD135  FIDUCIALUFIDUCIAL  [FIDUCIAL-MICRO]  28.07,89.79 0 top
FD136  FIDUCIALUFIDUCIAL  [FIDUCIAL-MICRO]  28.07,89.79 0 bottom
FD137  FIDUCIALUFIDUCIAL  [FIDUCIAL-MICRO]  29.84,129.16 0 top
FD138  FIDUCIALUFIDUCIAL  [FIDUCIAL-MICRO]  29.84,129.16 0 bottom
FD139  FIDUCIALUFIDUCIAL  [FIDUCIAL-MICRO]  39.24,89.79 0 top
FD140  FIDUCIALUFIDUCIAL  [FIDUCIAL-MICRO]  39.24,89.79 0 bottom
FD141  FIDUCIALUFIDUCIAL  [FIDUCIAL-MICRO]  41.02,129.16 0 top
FD142  FIDUCIALUFIDUCIAL  [FIDUCIAL-MICRO]  41.02,129.16 0 bottom
FD143  FIDUCIALUFIDUCIAL  [FIDUCIAL-MICRO]  50.42,89.79 0 top
FD144  FIDUCIALUFIDUCIAL  [FIDUCIAL-MICRO]  50.42,89.79 0 bottom
FD145  FIDUCIALUFIDUCIAL  [FIDUCIAL-MICRO]  52.2,129.16 0 top
FD146  FIDUCIALUFIDUCIAL  [FIDUCIAL-MICRO]  52.2,129.16 0 bottom
FD147  FIDUCIALUFIDUCIAL  [FIDUCIAL-MICRO]  61.59,89.79 0 top
FD148  FIDUCIALUFIDUCIAL  [FIDUCIAL-MICRO]  61.59,89.79 0 bottom
FD149  FIDUCIALUFIDUCIAL  [FIDUCIAL-MICRO]  63.37,129.16 0 top
FD150  FIDUCIALUFIDUCIAL  [FIDUCIAL-MICRO]  63.37,129.16 0 bottom
FD151  FIDUCIALUFIDUCIAL  [FIDUCIAL-MICRO]  72.77,89.79 0 top
FD152  FIDUCIALUFIDUCIAL  [FIDUCIAL-MICRO]  72.77,89.79 0 bottom
FD153  FIDUCIALUFIDUCIAL  [FIDUCIAL-MICRO]  74.55,129.16 0 top
FD154  FIDUCIALUFIDUCIAL  [FIDUCIAL-MICRO]  74.55,129.16 0 bottom
FD155  FIDUCIALUFIDUCIAL  [FIDUCIAL-MICRO]  83.95,89.79 0 top
FD156  FIDUCIALUFIDUCIAL  [FIDUCIAL-MICRO]  83.95,89.79 0 bottom
FD157  FIDUCIALUFIDUCIAL  [FIDUCIAL-MICRO]  85.73,129.16 0 top
FD158  FIDUCIALUFIDUCIAL  [FIDUCIAL-MICRO]  85.73,129.16 0 bottom
FD159  FIDUCIALUFIDUCIAL  [FIDUCIAL-MICRO]  95.12,89.79 0 top
FD160  FIDUCIALUFIDUCIAL  [FIDUCIAL-MICRO]  95.12,89.79 0 bottom
FD161  FIDUCIALUFIDUCIAL  [FIDUCIAL-MICRO]  96.9,129.16 0 top
FD162  FIDUCIALUFIDUCIAL  [FIDUCIAL-MICRO]  96.9,129.16 0 bottom
FD163  FIDUCIALUFIDUCIAL  [FIDUCIAL-MICRO]  106.3,89.79 0 top
FD164  FIDUCIALUFIDUCIAL  [FIDUCIAL-MICRO]  106.3,89.79 0 bottom
FD165  FIDUCIALUFIDUCIAL  [FIDUCIAL-MICRO]  108.08,129.16 0 top
FD166  FIDUCIALUFIDUCIAL  [FIDUCIAL-MICRO]  108.08,129.16 0 bottom
FD167  FIDUCIALUFIDUCIAL  [FIDUCIAL-MICRO]  117.48,89.79 0 top
FD168  FIDUCIALUFIDUCIAL  [FIDUCIAL-MICRO]  117.48,89.79 0 bottom
FD169  FIDUCIALUFIDUCIAL  [FIDUCIAL-MICRO]  119.25,129.16 0 top
FD170  FIDUCIALUFIDUCIAL  [FIDUCIAL-MICRO]  119.25,129.16 0 bottom
FD171  FIDUCIALUFIDUCIAL  [FIDUCIAL-MICRO]  128.65,89.79 0 top
FD172  FIDUCIALUFIDUCIAL  [FIDUCIAL-MICRO]  128.65,89.79 0 bottom
FD173  FIDUCIALUFIDUCIAL  [FIDUCIAL-MICRO]  130.43,129.16 0 top
FD174  FIDUCIALUFIDUCIAL  [FIDUCIAL-MICRO]  130.43,129.16 0 bottom
FD175  FIDUCIALUFIDUCIAL  [FIDUCIAL-MICRO]  139.83,89.79 0 top
FD176  FIDUCIALUFIDUCIAL  [FIDUCIAL-MICRO]  139.83,89.79 0 bottom
FD177  FIDUCIALUFIDUCIAL  [FIDUCIAL-MICRO]  141.61,129.16 0 top
FD178  FIDUCIALUFIDUCIAL  [FIDUCIAL-MICRO]  141.61,129.16 0 bottom
FD179  FIDUCIALUFIDUCIAL  [FIDUCIAL-MICRO]  151,89.79 0 top
FD180  FIDUCIALUFIDUCIAL  [FIDUCIAL-MICRO]  151,89.79 0 bottom
FD181  FIDUCIALUFIDUCIAL  [FIDUCIAL-MICRO]  152.78,129.16 0 top
FD182  FIDUCIALUFIDUCIAL  [FIDUCIAL-MICRO]  152.78,129.16 0 bottom
FD183  FIDUCIALUFIDUCIAL  [FIDUCIAL-MICRO]  162.18,89.79 0 top
FD184  FIDUCIALUFIDUCIAL  [FIDUCIAL-MICRO]  162.18,89.79 0 bottom
FD185  FIDUCIALUFIDUCIAL  [FIDUCIAL-MICRO]  163.96,129.16 0 top
FD186  FIDUCIALUFIDUCIAL  [FIDUCIAL-MICRO]  163.96,129.16 0 bottom
FD187  FIDUCIALUFIDUCIAL  [FIDUCIAL-MICRO]  173.36,89.79 0 top
FD188  FIDUCIALUFIDUCIAL  [FIDUCIAL-MICRO]  173.36,89.79 0 bottom
FD189  FIDUCIALUFIDUCIAL  [FIDUCIAL-MICRO]  175.13,129.16 0 top
FD190  FIDUCIALUFIDUCIAL  [FIDUCIAL-MICRO]  175.13,129.16 0 bottom
FD191  FIDUCIALUFIDUCIAL  [FIDUCIAL-MICRO]  184.53,89.79 0 top
FD192  FIDUCIALUFIDUCIAL  [FIDUCIAL-MICRO]  184.53,89.79 0 bottom
IN  [FPC_16_0.5MM]  12.19,45.4 0 bottom
IN1  [FPC_16_0.5MM]  23.37,45.4 0 bottom
IN2  [FPC_16_0.5MM]  34.54,45.4 0 bottom
IN3  [FPC_16_0.5MM]  45.72,45.4 0 bottom
IN4  [FPC_16_0.5MM]  56.9,45.4 0 bottom
IN5  [FPC_16_0.5MM]  68.07,45.4 0 bottom
IN6  [FPC_16_0.5MM]  79.25,45.4 0 bottom
IN7  [FPC_16_0.5MM]  90.42,45.4 0 bottom
IN8  [FPC_16_0.5MM]  101.6,45.4 0 bottom
IN9  [FPC_16_0.5MM]  112.78,45.4 0 bottom
IN10  [FPC_16_0.5MM]  123.95,45.4 0 bottom
IN11  [FPC_16_0.5MM]  135.13,45.4 0 bottom
IN12  [FPC_16_0.5MM]  146.3,45.4 0 bottom
IN13  [FPC_16_0.5MM]  157.48,45.4 0 bottom
IN14  [FPC_16_0.5MM]  168.66,45.4 0 bottom
IN15  [FPC_16_0.5MM]  179.83,45.4 0 bottom
IN16  [FPC_16_0.5MM]  12.19,86.55 0 bottom
IN17  [FPC_16_0.5MM]  23.37,86.55 0 bottom
IN18  [FPC_16_0.5MM]  34.54,86.55 0 bottom
IN19  [FPC_16_0.5MM]  45.72,86.55 0 bottom
IN20  [FPC_16_0.5MM]  56.9,86.55 0 bottom
IN21  [FPC_16_0.5MM]  68.07,86.55 0 bottom
IN22  [FPC_16_0.5MM]  79.25,86.55 0 bottom
IN23  [FPC_16_0.5MM]  90.42,86.55 0 bottom
IN24  [FPC_16_0.5MM]  101.6,86.55 0 bottom
IN25  [FPC_16_0.5MM]  112.78,86.55 0 bottom
IN26  [FPC_16_0.5MM]  123.95,86.55 0 bottom
IN27  [FPC_16_0.5MM]  135.13,86.55 0 bottom
IN28  [FPC_16_0.5MM]  146.3,86.55 0 bottom
IN29  [FPC_16_0.5MM]  157.48,86.55 0 bottom
IN30  [FPC_16_0.5MM]  168.66,86.55 0 bottom
IN31  [FPC_16_0.5MM]  179.83,86.55 0 bottom
IN32  [FPC_16_0.5MM]  12.19,127.7 0 bottom
IN33  [FPC_16_0.5MM]  23.37,127.7 0 bottom
IN34  [FPC_16_0.5MM]  34.54,127.7 0 bottom
IN35  [FPC_16_0.5MM]  45.72,127.7 0 bottom
IN36  [FPC_16_0.5MM]  56.9,127.7 0 bottom
IN37  [FPC_16_0.5MM]  68.07,127.7 0 bottom
IN38  [FPC_16_0.5MM]  79.25,127.7 0 bottom
IN39  [FPC_16_0.5MM]  90.42,127.7 0 bottom
IN40  [FPC_16_0.5MM]  101.6,127.7 0 bottom
IN41  [FPC_16_0.5MM]  112.78,127.7 0 bottom
IN42  [FPC_16_0.5MM]  123.95,127.7 0 bottom
IN43  [FPC_16_0.5MM]  135.13,127.7 0 bottom
IN44  [FPC_16_0.5MM]  146.3,127.7 0 bottom
IN45  [FPC_16_0.5MM]  157.48,127.7 0 bottom
IN46  [FPC_16_0.5MM]  168.66,127.7 0 bottom
IN47  [FPC_16_0.5MM]  179.83,127.7 0 bottom
JP1  JUMPER-SMT_3_NO_SILK  [SMT-JUMPER_3_NO_SILK]  12.19,15.75 0 bottom
JP2  JUMPER-SMT_3_NO_SILK  [SMT-JUMPER_3_NO_SILK]  23.37,15.75 0 bottom
JP3  JUMPER-SMT_3_NO_SILK  [SMT-JUMPER_3_NO_SILK]  34.54,15.75 0 bottom
JP4  JUMPER-SMT_3_NO_SILK  [SMT-JUMPER_3_NO_SILK]  45.72,15.75 0 bottom
JP5  JUMPER-SMT_3_NO_SILK  [SMT-JUMPER_3_NO_SILK]  56.9,15.75 0 bottom
JP6  JUMPER-SMT_3_NO_SILK  [SMT-JUMPER_3_NO_SILK]  68.07,15.75 0 bottom
JP7  JUMPER-SMT_3_NO_SILK  [SMT-JUMPER_3_NO_SILK]  79.25,15.75 0 bottom
JP8  JUMPER-SMT_3_NO_SILK  [SMT-JUMPER_3_NO_SILK]  90.42,15.75 0 bottom
JP9  JUMPER-SMT_3_NO_SILK  [SMT-JUMPER_3_NO_SILK]  101.6,15.75 0 bottom
JP10  JUMPER-SMT_3_NO_SILK  [SMT-JUMPER_3_NO_SILK]  112.78,15.75 0 bottom
JP11  JUMPER-SMT_3_NO_SILK  [SMT-JUMPER_3_NO_SILK]  123.95,15.75 0 bottom
JP12  JUMPER-SMT_3_NO_SILK  [SMT-JUMPER_3_NO_SILK]  135.13,15.75 0 bottom
JP13  JUMPER-SMT_3_NO_SILK  [SMT-JUMPER_3_NO_SILK]  146.3,15.75 0 bottom
JP14  JUMPER-SMT_3_NO_SILK  [SMT-JUMPER_3_NO_SILK]  157.48,15.75 0 bottom
JP15  JUMPER-SMT_3_NO_SILK  [SMT-JUMPER_3_NO_SILK]  168.66,15.75 0 bottom
JP16  JUMPER-SMT_3_NO_SILK  [SMT-JUMPER_3_NO_SILK]  179.83,15.75 0 bottom
JP17  JUMPER-SMT_3_NO_SILK  [SMT-JUMPER_3_NO_SILK]  12.19,56.9 0 bottom
JP18  JUMPER-SMT_3_NO_SILK  [SMT-JUMPER_3_NO_SILK]  23.37,56.9 0 bottom
JP19  JUMPER-SMT_3_NO_SILK  [SMT-JUMPER_3_NO_SILK]  34.54,56.9 0 bottom
JP20  JUMPER-SMT_3_NO_SILK  [SMT-JUMPER_3_NO_SILK]  45.72,56.9 0 bottom
JP21  JUMPER-SMT_3_NO_SILK  [SMT-JUMPER_3_NO_SILK]  56.9,56.9 0 bottom
JP22  JUMPER-SMT_3_NO_SILK  [SMT-JUMPER_3_NO_SILK]  68.07,56.9 0 bottom
JP23  JUMPER-SMT_3_NO_SILK  [SMT-JUMPER_3_NO_SILK]  79.25,56.9 0 bottom
JP24  JUMPER-SMT_3_NO_SILK  [SMT-JUMPER_3_NO_SILK]  90.42,56.9 0 bottom
JP25  JUMPER-SMT_3_NO_SILK  [SMT-JUMPER_3_NO_SILK]  101.6,56.9 0 bottom
JP26  JUMPER-SMT_3_NO_SILK  [SMT-JUMPER_3_NO_SILK]  112.78,56.9 0 bottom
JP27  JUMPER-SMT_3_NO_SILK  [SMT-JUMPER_3_NO_SILK]  123.95,56.9 0 bottom
JP28  JUMPER-SMT_3_NO_SILK  [SMT-JUMPER_3_NO_SILK]  135.13,56.9 0 bottom
JP29  JUMPER-SMT_3_NO_SILK  [SMT-JUMPER_3_NO_SILK]  146.3,56.9 0 bottom
JP30  JUMPER-SMT_3_NO_SILK  [SMT-JUMPER_3_NO_SILK]  157.48,56.9 0 bottom
JP31  JUMPER-SMT_3_NO_SILK  [SMT-JUMPER_3_NO_SILK]  168.66,56.9 0 bottom
JP32  JUMPER-SMT_3_NO_SILK  [SMT-JUMPER_3_NO_SILK]  179.83,56.9 0 bottom
JP33  JUMPER-SMT_3_NO_SILK  [SMT-JUMPER_3_NO_SILK]  12.19,98.04 0 bottom
JP34  JUMPER-SMT_3_NO_SILK  [SMT-JUMPER_3_NO_SILK]  23.37,98.04 0 bottom
JP35  JUMPER-SMT_3_NO_SILK  [SMT-JUMPER_3_NO_SILK]  34.54,98.04 0 bottom
JP36  JUMPER-SMT_3_NO_SILK  [SMT-JUMPER_3_NO_SILK]  45.72,98.04 0 bottom
JP37  JUMPER-SMT_3_NO_SILK  [SMT-JUMPER_3_NO_SILK]  56.9,98.04 0 bottom
JP38  JUMPER-SMT_3_NO_SILK  [SMT-JUMPER_3_NO_SILK]  68.07,98.04 0 bottom
JP39  JUMPER-SMT_3_NO_SILK  [SMT-JUMPER_3_NO_SILK]  79.25,98.04 0 bottom
JP40  JUMPER-SMT_3_NO_SILK  [SMT-JUMPER_3_NO_SILK]  90.42,98.04 0 bottom
JP41  JUMPER-SMT_3_NO_SILK  [SMT-JUMPER_3_NO_SILK]  101.6,98.04 0 bottom
JP42  JUMPER-SMT_3_NO_SILK  [SMT-JUMPER_3_NO_SILK]  112.78,98.04 0 bottom
JP43  JUMPER-SMT_3_NO_SILK  [SMT-JUMPER_3_NO_SILK]  123.95,98.04 0 bottom
JP44  JUMPER-SMT_3_NO_SILK  [SMT-JUMPER_3_NO_SILK]  135.13,98.04 0 bottom
JP45  JUMPER-SMT_3_NO_SILK  [SMT-JUMPER_3_NO_SILK]  146.3,98.04 0 bottom
JP46  JUMPER-SMT_3_NO_SILK  [SMT-JUMPER_3_NO_SILK]  157.48,98.04 0 bottom
JP47  JUMPER-SMT_3_NO_SILK  [SMT-JUMPER_3_NO_SILK]  168.66,98.04 0 bottom
JP48  JUMPER-SMT_3_NO_SILK  [SMT-JUMPER_3_NO_SILK]  179.83,98.04 0 bottom
LOGO1  OSHW-LOGOMINI  [OSHW-LOGO-MINI]  19.68,32.89 90 top
LOGO2  OSHW-LOGOMINI  [OSHW-LOGO-MINI]  8.51,32.89 90 top
LOGO3  OSHW-LOGOMINI  [OSHW-LOGO-MINI]  14.99,28.45 90 bottom
LOGO4  OSHW-LOGOMINI  [OSHW-LOGO-MINI]  26.16,28.45 90 bottom
LOGO5  OSHW-LOGOMINI  [OSHW-LOGO-MINI]  30.86,32.89 90 top
LOGO6  OSHW-LOGOMINI  [OSHW-LOGO-MINI]  37.34,28.45 90 bottom
LOGO7  OSHW-LOGOMINI  [OSHW-LOGO-MINI]  42.04,32.89 90 top
LOGO8  OSHW-LOGOMINI  [OSHW-LOGO-MINI]  48.51,28.45 90 bottom
LOGO9  OSHW-LOGOMINI  [OSHW-LOGO-MINI]  53.21,32.89 90 top
LOGO10  OSHW-LOGOMINI  [OSHW-LOGO-MINI]  59.69,28.45 90 bottom
LOGO11  OSHW-LOGOMINI  [OSHW-LOGO-MINI]  64.39,32.89 90 top
LOGO12  OSHW-LOGOMINI  [OSHW-LOGO-MINI]  70.87,28.45 90 bottom
LOGO13  OSHW-LOGOMINI  [OSHW-LOGO-MINI]  75.56,32.89 90 top
LOGO14  OSHW-LOGOMINI  [OSHW-LOGO-MINI]  82.04,28.45 90 bottom
LOGO15  OSHW-LOGOMINI  [OSHW-LOGO-MINI]  86.74,32.89 90 top
LOGO16  OSHW-LOGOMINI  [OSHW-LOGO-MINI]  93.22,28.45 90 bottom
LOGO17  OSHW-LOGOMINI  [OSHW-LOGO-MINI]  97.92,32.89 90 top
LOGO18  OSHW-LOGOMINI  [OSHW-LOGO-MINI]  104.39,28.45 90 bottom
LOGO19  OSHW-LOGOMINI  [OSHW-LOGO-MINI]  109.09,32.89 90 top
LOGO20  OSHW-LOGOMINI  [OSHW-LOGO-MINI]  115.57,28.45 90 bottom
LOGO21  OSHW-LOGOMINI  [OSHW-LOGO-MINI]  120.27,32.89 90 top
LOGO22  OSHW-LOGOMINI  [OSHW-LOGO-MINI]  126.75,28.45 90 bottom
LOGO23  OSHW-LOGOMINI  [OSHW-LOGO-MINI]  131.44,32.89 90 top
LOGO24  OSHW-LOGOMINI  [OSHW-LOGO-MINI]  137.92,28.45 90 bottom
LOGO25  OSHW-LOGOMINI  [OSHW-LOGO-MINI]  142.62,32.89 90 top
LOGO26  OSHW-LOGOMINI  [OSHW-LOGO-MINI]  149.1,28.45 90 bottom
LOGO27  OSHW-LOGOMINI  [OSHW-LOGO-MINI]  153.8,32.89 90 top
LOGO28  OSHW-LOGOMINI  [OSHW-LOGO-MINI]  160.27,28.45 90 bottom
LOGO29  OSHW-LOGOMINI  [OSHW-LOGO-MINI]  164.97,32.89 90 top
LOGO30  OSHW-LOGOMINI  [OSHW-LOGO-MINI]  171.45,28.45 90 bottom
LOGO31  OSHW-LOGOMINI  [OSHW-LOGO-MINI]  176.15,32.89 90 top
LOGO32  OSHW-LOGOMINI  [OSHW-LOGO-MINI]  182.63,28.45 90 bottom
LOGO33  OSHW-LOGOMINI  [OSHW-LOGO-MINI]  8.51,74.04 90 top
LOGO34  OSHW-LOGOMINI  [OSHW-LOGO-MINI]  14.99,69.6 90 bottom
LOGO35  OSHW-LOGOMINI  [OSHW-LOGO-MINI]  19.68,74.04 90 top
LOGO36  OSHW-LOGOMINI  [OSHW-LOGO-MINI]  26.16,69.6 90 bottom
LOGO37  OSHW-LOGOMINI  [OSHW-LOGO-MINI]  30.86,74.04 90 top
LOGO38  OSHW-LOGOMINI  [OSHW-LOGO-MINI]  37.34,69.6 90 bottom
LOGO39  OSHW-LOGOMINI  [OSHW-LOGO-MINI]  42.04,74.04 90 top
LOGO40  OSHW-LOGOMINI  [OSHW-LOGO-MINI]  48.51,69.6 90 bottom
LOGO41  OSHW-LOGOMINI  [OSHW-LOGO-MINI]  53.21,74.04 90 top
LOGO42  OSHW-LOGOMINI  [OSHW-LOGO-MINI]  59.69,69.6 90 bottom
LOGO43  OSHW-LOGOMINI  [OSHW-LOGO-MINI]  64.39,74.04 90 top
LOGO44  OSHW-LOGOMINI  [OSHW-LOGO-MINI]  70.87,69.6 90 bottom
LOGO45  OSHW-LOGOMINI  [OSHW-LOGO-MINI]  75.56,74.04 90 top
LOGO46  OSHW-LOGOMINI  [OSHW-LOGO-MINI]  82.04,69.6 90 bottom
LOGO47  OSHW-LOGOMINI  [OSHW-LOGO-MINI]  86.74,74.04 90 top
LOGO48  OSHW-LOGOMINI  [OSHW-LOGO-MINI]  93.22,69.6 90 bottom
LOGO49  OSHW-LOGOMINI  [OSHW-LOGO-MINI]  97.92,74.04 90 top
LOGO50  OSHW-LOGOMINI  [OSHW-LOGO-MINI]  104.39,69.6 90 bottom
LOGO51  OSHW-LOGOMINI  [OSHW-LOGO-MINI]  109.09,74.04 90 top
LOGO52  OSHW-LOGOMINI  [OSHW-LOGO-MINI]  115.57,69.6 90 bottom
LOGO53  OSHW-LOGOMINI  [OSHW-LOGO-MINI]  120.27,74.04 90 top
LOGO54  OSHW-LOGOMINI  [OSHW-LOGO-MINI]  126.75,69.6 90 bottom
LOGO55  OSHW-LOGOMINI  [OSHW-LOGO-MINI]  131.44,74.04 90 top
LOGO56  OSHW-LOGOMINI  [OSHW-LOGO-MINI]  137.92,69.6 90 bottom
LOGO57  OSHW-LOGOMINI  [OSHW-LOGO-MINI]  142.62,74.04 90 top
LOGO58  OSHW-LOGOMINI  [OSHW-LOGO-MINI]  149.1,69.6 90 bottom
LOGO59  OSHW-LOGOMINI  [OSHW-LOGO-MINI]  153.8,74.04 90 top
LOGO60  OSHW-LOGOMINI  [OSHW-LOGO-MINI]  160.27,69.6 90 bottom
LOGO61  OSHW-LOGOMINI  [OSHW-LOGO-MINI]  164.97,74.04 90 top
LOGO62  OSHW-LOGOMINI  [OSHW-LOGO-MINI]  171.45,69.6 90 bottom
LOGO63  OSHW-LOGOMINI  [OSHW-LOGO-MINI]  176.15,74.04 90 top
LOGO64  OSHW-LOGOMINI  [OSHW-LOGO-MINI]  182.63,69.6 90 bottom
LOGO65  OSHW-LOGOMINI  [OSHW-LOGO-MINI]  8.51,115.19 90 top
LOGO66  OSHW-LOGOMINI  [OSHW-LOGO-MINI]  14.99,110.74 90 bottom
LOGO67  OSHW-LOGOMINI  [OSHW-LOGO-MINI]  19.68,115.19 90 top
LOGO68  OSHW-LOGOMINI  [OSHW-LOGO-MINI]  26.16,110.74 90 bottom
LOGO69  OSHW-LOGOMINI  [OSHW-LOGO-MINI]  30.86,115.19 90 top
LOGO70  OSHW-LOGOMINI  [OSHW-LOGO-MINI]  37.34,110.74 90 bottom
LOGO71  OSHW-LOGOMINI  [OSHW-LOGO-MINI]  42.04,115.19 90 top
LOGO72  OSHW-LOGOMINI  [OSHW-LOGO-MINI]  48.51,110.74 90 bottom
LOGO73  OSHW-LOGOMINI  [OSHW-LOGO-MINI]  53.21,115.19 90 top
LOGO74  OSHW-LOGOMINI  [OSHW-LOGO-MINI]  59.69,110.74 90 bottom
LOGO75  OSHW-LOGOMINI  [OSHW-LOGO-MINI]  64.39,115.19 90 top
LOGO76  OSHW-LOGOMINI  [OSHW-LOGO-MINI]  70.87,110.74 90 bottom
LOGO77  OSHW-LOGOMINI  [OSHW-LOGO-MINI]  75.56,115.19 90 top
LOGO78  OSHW-LOGOMINI  [OSHW-LOGO-MINI]  82.04,110.74 90 bottom
LOGO79  OSHW-LOGOMINI  [OSHW-LOGO-MINI]  86.74,115.19 90 top
LOGO80  OSHW-LOGOMINI  [OSHW-LOGO-MINI]  93.22,110.74 90 bottom
LOGO81  OSHW-LOGOMINI  [OSHW-LOGO-MINI]  97.92,115.19 90 top
LOGO82  OSHW-LOGOMINI  [OSHW-LOGO-MINI]  104.39,110.74 90 bottom
LOGO83  OSHW-LOGOMINI  [OSHW-LOGO-MINI]  109.09,115.19 90 top
LOGO84  OSHW-LOGOMINI  [OSHW-LOGO-MINI]  115.57,110.74 90 bottom
LOGO85  OSHW-LOGOMINI  [OSHW-LOGO-MINI]  120.27,115.19 90 top
LOGO86  OSHW-LOGOMINI  [OSHW-LOGO-MINI]  126.75,110.74 90 bottom
LOGO87  OSHW-LOGOMINI  [OSHW-LOGO-MINI]  131.44,115.19 90 top
LOGO88  OSHW-LOGOMINI  [OSHW-LOGO-MINI]  137.92,110.74 90 bottom
LOGO89  OSHW-LOGOMINI  [OSHW-LOGO-MINI]  142.62,115.19 90 top
LOGO90  OSHW-LOGOMINI  [OSHW-LOGO-MINI]  149.1,110.74 90 bottom
LOGO91  OSHW-LOGOMINI  [OSHW-LOGO-MINI]  153.8,115.19 90 top
LOGO92  OSHW-LOGOMINI  [OSHW-LOGO-MINI]  160.27,110.74 90 bottom
LOGO93  OSHW-LOGOMINI  [OSHW-LOGO-MINI]  164.97,115.19 90 top
LOGO94  OSHW-LOGOMINI  [OSHW-LOGO-MINI]  171.45,110.74 90 bottom
LOGO95  OSHW-LOGOMINI  [OSHW-LOGO-MINI]  176.15,115.19 90 top
LOGO96  OSHW-LOGOMINI  [OSHW-LOGO-MINI]  182.63,110.74 90 bottom
OUT  [FPC_16_0.5MM]  12.19,8.95 180 top
OUT1  [FPC_16_0.5MM]  23.37,8.95 180 top
OUT2  [FPC_16_0.5MM]  34.54,8.95 180 top
OUT3  [FPC_16_0.5MM]  45.72,8.95 180 top
OUT4  [FPC_16_0.5MM]  56.9,8.95 180 top
OUT5  [FPC_16_0.5MM]  68.07,8.95 180 top
OUT6  [FPC_16_0.5MM]  79.25,8.95 180 top
OUT7  [FPC_16_0.5MM]  90.42,8.95 180 top
OUT8  [FPC_16_0.5MM]  101.6,8.95 180 top
OUT9  [FPC_16_0.5MM]  112.78,8.95 180 top
OUT10  [FPC_16_0.5MM]  123.95,8.95 180 top
OUT11  [FPC_16_0.5MM]  135.13,8.95 180 top
OUT12  [FPC_16_0.5MM]  146.3,8.95 180 top
OUT13  [FPC_16_0.5MM]  157.48,8.95 180 top
OUT14  [FPC_16_0.5MM]  168.66,8.95 180 top
OUT15  [FPC_16_0.5MM]  179.83,8.95 180 top
OUT16  [FPC_16_0.5MM]  12.19,50.1 180 top
OUT17  [FPC_16_0.5MM]  23.37,50.1 180 top
OUT18  [FPC_16_0.5MM]  34.54,50.1 180 top
OUT19  [FPC_16_0.5MM]  45.72,50.1 180 top
OUT20  [FPC_16_0.5MM]  56.9,50.1 180 top
OUT21  [FPC_16_0.5MM]  68.07,50.1 180 top
OUT22  [FPC_16_0.5MM]  79.25,50.1 180 top
OUT23  [FPC_16_0.5MM]  90.42,50.1 180 top
OUT24  [FPC_16_0.5MM]  101.6,50.1 180 top
OUT25  [FPC_16_0.5MM]  112.78,50.1 180 top
OUT26  [FPC_16_0.5MM]  123.95,50.1 180 top
OUT27  [FPC_16_0.5MM]  135.13,50.1 180 top
OUT28  [FPC_16_0.5MM]  146.3,50.1 180 top
OUT29  [FPC_16_0.5MM]  157.48,50.1 180 top
OUT30  [FPC_16_0.5MM]  168.66,50.1 180 top
OUT31  [FPC_16_0.5MM]  179.83,50.1 180 top
OUT32  [FPC_16_0.5MM]  12.19,91.25 180 top
OUT33  [FPC_16_0.5MM]  23.37,91.25 180 top
OUT34  [FPC_16_0.5MM]  34.54,91.25 180 top
OUT35  [FPC_16_0.5MM]  45.72,91.25 180 top
OUT36  [FPC_16_0.5MM]  56.9,91.25 180 top
OUT37  [FPC_16_0.5MM]  68.07,91.25 180 top
OUT38  [FPC_16_0.5MM]  79.25,91.25 180 top
OUT39  [FPC_16_0.5MM]  90.42,91.25 180 top
OUT40  [FPC_16_0.5MM]  101.6,91.25 180 top
OUT41  [FPC_16_0.5MM]  112.78,91.25 180 top
OUT42  [FPC_16_0.5MM]  123.95,91.25 180 top
OUT43  [FPC_16_0.5MM]  135.13,91.25 180 top
OUT44  [FPC_16_0.5MM]  146.3,91.25 180 top
OUT45  [FPC_16_0.5MM]  157.48,91.25 180 top
OUT46  [FPC_16_0.5MM]  168.66,91.25 180 top
OUT47  [FPC_16_0.5MM]  179.83,91.25 180 top
R1  4.7  [0402-TIGHT]  12.19,23.88 0 top
R2  4.7k  [0402-TIGHT]  12.19,17.78 0 top
R3  4.7k  [0402-TIGHT]  12.19,16.83 0 top
R4  4.7  [0402-TIGHT]  12.19,34.16 0 top
R5  4.7  [0402-TIGHT]  23.37,23.88 0 top
R6  4.7k  [0402-TIGHT]  23.37,17.78 0 top
R7  4.7k  [0402-TIGHT]  23.37,16.83 0 top
R8  4.7  [0402-TIGHT]  23.37,34.16 0 top
R9  4.7  [0402-TIGHT]  34.54,23.88 0 top
R10  4.7k  [0402-TIGHT]  34.54,17.78 0 top
R11  4.7k  [0402-TIGHT]  34.54,16.83 0 top
R12  4.7  [0402-TIGHT]  34.54,34.16 0 top
R13  4.7  [0402-TIGHT]  45.72,23.88 0 top
R14  4.7k  [0402-TIGHT]  45.72,17.78 0 top
R15  4.7k  [0402-TIGHT]  45.72,16.83 0 top
R16  4.7  [0402-TIGHT]  45.72,34.16 0 top
R17  4.7  [0402-TIGHT]  56.9,23.88 0 top
R18  4.7k  [0402-TIGHT]  56.9,17.78 0 top
R19  4.7k  [0402-TIGHT]  56.9,16.83 0 top
R20  4.7  [0402-TIGHT]  56.9,34.16 0 top
R21  4.7  [0402-TIGHT]  68.07,23.88 0 top
R22  4.7k  [0402-TIGHT]  68.07,17.78 0 top
R23  4.7k  [0402-TIGHT]  68.07,16.83 0 top
R24  4.7  [0402-TIGHT]  68.07,34.16 0 top
R25  4.7  [0402-TIGHT]  79.25,23.88 0 top
R26  4.7k  [0402-TIGHT]  79.25,17.78 0 top
R27  4.7k  [0402-TIGHT]  79.25,16.83 0 top
R28  4.7  [0402-TIGHT]  79.25,34.16 0 top
R29  4.7  [0402-TIGHT]  90.42,23.88 0 top
R30  4.7k  [0402-TIGHT]  90.42,17.78 0 top
R31  4.7k  [0402-TIGHT]  90.42,16.83 0 top
R32  4.7  [0402-TIGHT]  90.42,34.16 0 top
R33  4.7  [0402-TIGHT]  101.6,23.88 0 top
R34  4.7k  [0402-TIGHT]  101.6,17.78 0 top
R35  4.7k  [0402-TIGHT]  101.6,16.83 0 top
R36  4.7  [0402-TIGHT]  101.6,34.16 0 top
R37  4.7  [0402-TIGHT]  112.78,23.88 0 top
R38  4.7k  [0402-TIGHT]  112.78,17.78 0 top
R39  4.7k  [0402-TIGHT]  112.78,16.83 0 top
R40  4.7  [0402-TIGHT]  112.78,34.16 0 top
R41  4.7  [0402-TIGHT]  123.95,23.88 0 top
R42  4.7k  [0402-TIGHT]  123.95,17.78 0 top
R43  4.7k  [0402-TIGHT]  123.95,16.83 0 top
R44  4.7  [0402-TIGHT]  123.95,34.16 0 top
R45  4.7  [0402-TIGHT]  135.13,23.88 0 top
R46  4.7k  [0402-TIGHT]  135.13,17.78 0 top
R47  4.7k  [0402-TIGHT]  135.13,16.83 0 top
R48  4.7  [0402-TIGHT]  135.13,34.16 0 top
R49  4.7  [0402-TIGHT]  146.3,23.88 0 top
R50  4.7k  [0402-TIGHT]  146.3,17.78 0 top
R51  4.7k  [0402-TIGHT]  146.3,16.83 0 top
R52  4.7  [0402-TIGHT]  146.3,34.16 0 top
R53  4.7  [0402-TIGHT]  157.48,23.88 0 top
R54  4.7k  [0402-TIGHT]  157.48,17.78 0 top
R55  4.7k  [0402-TIGHT]  157.48,16.83 0 top
R56  4.7  [0402-TIGHT]  157.48,34.16 0 top
R57  4.7  [0402-TIGHT]  168.66,23.88 0 top
R58  4.7k  [0402-TIGHT]  168.66,17.78 0 top
R59  4.7k  [0402-TIGHT]  168.66,16.83 0 top
R60  4.7  [0402-TIGHT]  168.66,34.16 0 top
R61  4.7  [0402-TIGHT]  179.83,23.88 0 top
R62  4.7k  [0402-TIGHT]  179.83,17.78 0 top
R63  4.7k  [0402-TIGHT]  179.83,16.83 0 top
R64  4.7  [0402-TIGHT]  179.83,34.16 0 top
R65  4.7  [0402-TIGHT]  12.19,65.02 0 top
R66  4.7k  [0402-TIGHT]  12.19,58.93 0 top
R67  4.7k  [0402-TIGHT]  12.19,57.98 0 top
R68  4.7  [0402-TIGHT]  12.19,75.31 0 top
R69  4.7  [0402-TIGHT]  23.37,65.02 0 top
R70  4.7k  [0402-TIGHT]  23.37,58.93 0 top
R71  4.7k  [0402-TIGHT]  23.37,57.98 0 top
R72  4.7  [0402-TIGHT]  23.37,75.31 0 top
R73  4.7  [0402-TIGHT]  34.54,65.02 0 top
R74  4.7k  [0402-TIGHT]  34.54,58.93 0 top
R75  4.7k  [0402-TIGHT]  34.54,57.98 0 top
R76  4.7  [0402-TIGHT]  34.54,75.31 0 top
R77  4.7  [0402-TIGHT]  45.72,65.02 0 top
R78  4.7k  [0402-TIGHT]  45.72,58.93 0 top
R79  4.7k  [0402-TIGHT]  45.72,57.98 0 top
R80  4.7  [0402-TIGHT]  45.72,75.31 0 top
R81  4.7  [0402-TIGHT]  56.9,65.02 0 top
R82  4.7k  [0402-TIGHT]  56.9,58.93 0 top
R83  4.7k  [0402-TIGHT]  56.9,57.98 0 top
R84  4.7  [0402-TIGHT]  56.9,75.31 0 top
R85  4.7  [0402-TIGHT]  68.07,65.02 0 top
R86  4.7k  [0402-TIGHT]  68.07,58.93 0 top
R87  4.7k  [0402-TIGHT]  68.07,57.98 0 top
R88  4.7  [0402-TIGHT]  68.07,75.31 0 top
R89  4.7  [0402-TIGHT]  79.25,65.02 0 top
R90  4.7k  [0402-TIGHT]  79.25,58.93 0 top
R91  4.7k  [0402-TIGHT]  79.25,57.98 0 top
R92  4.7  [0402-TIGHT]  79.25,75.31 0 top
R93  4.7  [0402-TIGHT]  90.42,65.02 0 top
R94  4.7k  [0402-TIGHT]  90.42,58.93 0 top
R95  4.7k  [0402-TIGHT]  90.42,57.98 0 top
R96  4.7  [0402-TIGHT]  90.42,75.31 0 top
R97  4.7  [0402-TIGHT]  101.6,65.02 0 top
R98  4.7k  [0402-TIGHT]  101.6,58.93 0 top
R99  4.7k  [0402-TIGHT]  101.6,57.98 0 top
R100  4.7  [0402-TIGHT]  101.6,75.31 0 top
R101  4.7  [0402-TIGHT]  112.78,65.02 0 top
R102  4.7k  [0402-TIGHT]  112.78,58.93 0 top
R103  4.7k  [0402-TIGHT]  112.78,57.98 0 top
R104  4.7  [0402-TIGHT]  112.78,75.31 0 top
R105  4.7  [0402-TIGHT]  123.95,65.02 0 top
R106  4.7k  [0402-TIGHT]  123.95,58.93 0 top
R107  4.7k  [0402-TIGHT]  123.95,57.98 0 top
R108  4.7  [0402-TIGHT]  123.95,75.31 0 top
R109  4.7  [0402-TIGHT]  135.13,65.02 0 top
R110  4.7k  [0402-TIGHT]  135.13,58.93 0 top
R111  4.7k  [0402-TIGHT]  135.13,57.98 0 top
R112  4.7  [0402-TIGHT]  135.13,75.31 0 top
R113  4.7  [0402-TIGHT]  146.3,65.02 0 top
R114  4.7k  [0402-TIGHT]  146.3,58.93 0 top
R115  4.7k  [0402-TIGHT]  146.3,57.98 0 top
R116  4.7  [0402-TIGHT]  146.3,75.31 0 top
R117  4.7  [0402-TIGHT]  157.48,65.02 0 top
R118  4.7k  [0402-TIGHT]  157.48,58.93 0 top
R119  4.7k  [0402-TIGHT]  157.48,57.98 0 top
R120  4.7  [0402-TIGHT]  157.48,75.31 0 top
R121  4.7  [0402-TIGHT]  168.66,65.02 0 top
R122  4.7k  [0402-TIGHT]  168.66,58.93 0 top
R123  4.7k  [0402-TIGHT]  168.66,57.98 0 top
R124  4.7  [0402-TIGHT]  168.66,75.31 0 top
R125  4.7  [0402-TIGHT]  179.83,65.02 0 top
R126  4.7k  [0402-TIGHT]  179.83,58.93 0 top
R127  4.7k  [0402-TIGHT]  179.83,57.98 0 top
R128  4.7  [0402-TIGHT]  179.83,75.31 0 top
R129  4.7  [0402-TIGHT]  12.19,106.17 0 top
R130  4.7k  [0402-TIGHT]  12.19,100.08 0 top
R131  4.7k  [0402-TIGHT]  12.19,99.12 0 top
R132  4.7  [0402-TIGHT]  12.19,116.46 0 top
R133  4.7  [0402-TIGHT]  23.37,106.17 0 top
R134  4.7k  [0402-TIGHT]  23.37,100.08 0 top
R135  4.7k  [0402-TIGHT]  23.37,99.12 0 top
R136  4.7  [0402-TIGHT]  23.37,116.46 0 top
R137  4.7  [0402-TIGHT]  34.54,106.17 0 top
R138  4.7k  [0402-TIGHT]  34.54,100.08 0 top
R139  4.7k  [0402-TIGHT]  34.54,99.12 0 top
R140  4.7  [0402-TIGHT]  34.54,116.46 0 top
R141  4.7  [0402-TIGHT]  45.72,106.17 0 top
R142  4.7k  [0402-TIGHT]  45.72,100.08 0 top
R143  4.7k  [0402-TIGHT]  45.72,99.12 0 top
R144  4.7  [0402-TIGHT]  45.72,116.46 0 top
R145  4.7  [0402-TIGHT]  56.9,106.17 0 top
R146  4.7k  [0402-TIGHT]  56.9,100.08 0 top
R147  4.7k  [0402-TIGHT]  56.9,99.12 0 top
R148  4.7  [0402-TIGHT]  56.9,116.46 0 top
R149  4.7  [0402-TIGHT]  68.07,106.17 0 top
R150  4.7k  [0402-TIGHT]  68.07,100.08 0 top
R151  4.7k  [0402-TIGHT]  68.07,99.12 0 top
R152  4.7  [0402-TIGHT]  68.07,116.46 0 top
R153  4.7  [0402-TIGHT]  79.25,106.17 0 top
R154  4.7k  [0402-TIGHT]  79.25,100.08 0 top
R155  4.7k  [0402-TIGHT]  79.25,99.12 0 top
R156  4.7  [0402-TIGHT]  79.25,116.46 0 top
R157  4.7  [0402-TIGHT]  90.42,106.17 0 top
R158  4.7k  [0402-TIGHT]  90.42,100.08 0 top
R159  4.7k  [0402-TIGHT]  90.42,99.12 0 top
R160  4.7  [0402-TIGHT]  90.42,116.46 0 top
R161  4.7  [0402-TIGHT]  101.6,106.17 0 top
R162  4.7k  [0402-TIGHT]  101.6,100.08 0 top
R163  4.7k  [0402-TIGHT]  101.6,99.12 0 top
R164  4.7  [0402-TIGHT]  101.6,116.46 0 top
R165  4.7  [0402-TIGHT]  112.78,106.17 0 top
R166  4.7k  [0402-TIGHT]  112.78,100.08 0 top
R167  4.7k  [0402-TIGHT]  112.78,99.12 0 top
R168  4.7  [0402-TIGHT]  112.78,116.46 0 top
R169  4.7  [0402-TIGHT]  123.95,106.17 0 top
R170  4.7k  [0402-TIGHT]  123.95,100.08 0 top
R171  4.7k  [0402-TIGHT]  123.95,99.12 0 top
R172  4.7  [0402-TIGHT]  123.95,116.46 0 top
R173  4.7  [0402-TIGHT]  135.13,106.17 0 top
R174  4.7k  [0402-TIGHT]  135.13,100.08 0 top
R175  4.7k  [0402-TIGHT]  135.13,99.12 0 top
R176  4.7  [0402-TIGHT]  135.13,116.46 0 top
R177  4.7  [0402-TIGHT]  146.3,106.17 0 top
R178  4.7k  [0402-TIGHT]  146.3,100.08 0 top
R179  4.7k  [0402-TIGHT]  146.3,99.12 0 top
R180  4.7  [0402-TIGHT]  146.3,116.46 0 top
R181  4.7  [0402-TIGHT]  157.48,106.17 0 top
R182  4.7k  [0402-TIGHT]  157.48,100.08 0 top
R183  4.7k  [0402-TIGHT]  157.48,99.12 0 top
R184  4.7  [0402-TIGHT]  157.48,116.46 0 top
R185  4.7  [0402-TIGHT]  168.66,106.17 0 top
R186  4.7k  [0402-TIGHT]  168.66,100.08 0 top
R187  4.7k  [0402-TIGHT]  168.66,99.12 0 top
R188  4.7  [0402-TIGHT]  168.66,116.46 0 top
R189  4.7  [0402-TIGHT]  179.83,106.17 0 top
R190  4.7k  [0402-TIGHT]  179.83,100.08 0 top
R191  4.7k  [0402-TIGHT]  179.83,99.12 0 top
R192  4.7  [0402-TIGHT]  179.83,116.46 0 top
U1  SGP40  [SGP40]  12.19,20.83 0 top
U2  BME280  [LGA-8-2.5X2.5]  12.19,29.72 0 top
U3  VEML7700-TT  [VEML7700_TT]  12.19,38.61 0 top
U4  SGP40  [SGP40]  23.37,20.83 0 top
U5  BME280  [LGA-8-2.5X2.5]  23.37,29.72 0 top
U6  VEML7700-TT  [VEML7700_TT]  23.37,38.61 0 top
U7  SGP40  [SGP40]  34.54,20.83 0 top
U8  BME280  [LGA-8-2.5X2.5]  34.54,29.72 0 top
U9  VEML7700-TT  [VEML7700_TT]  34.54,38.61 0 top